# Allegro board LAY-97011_A1.brd
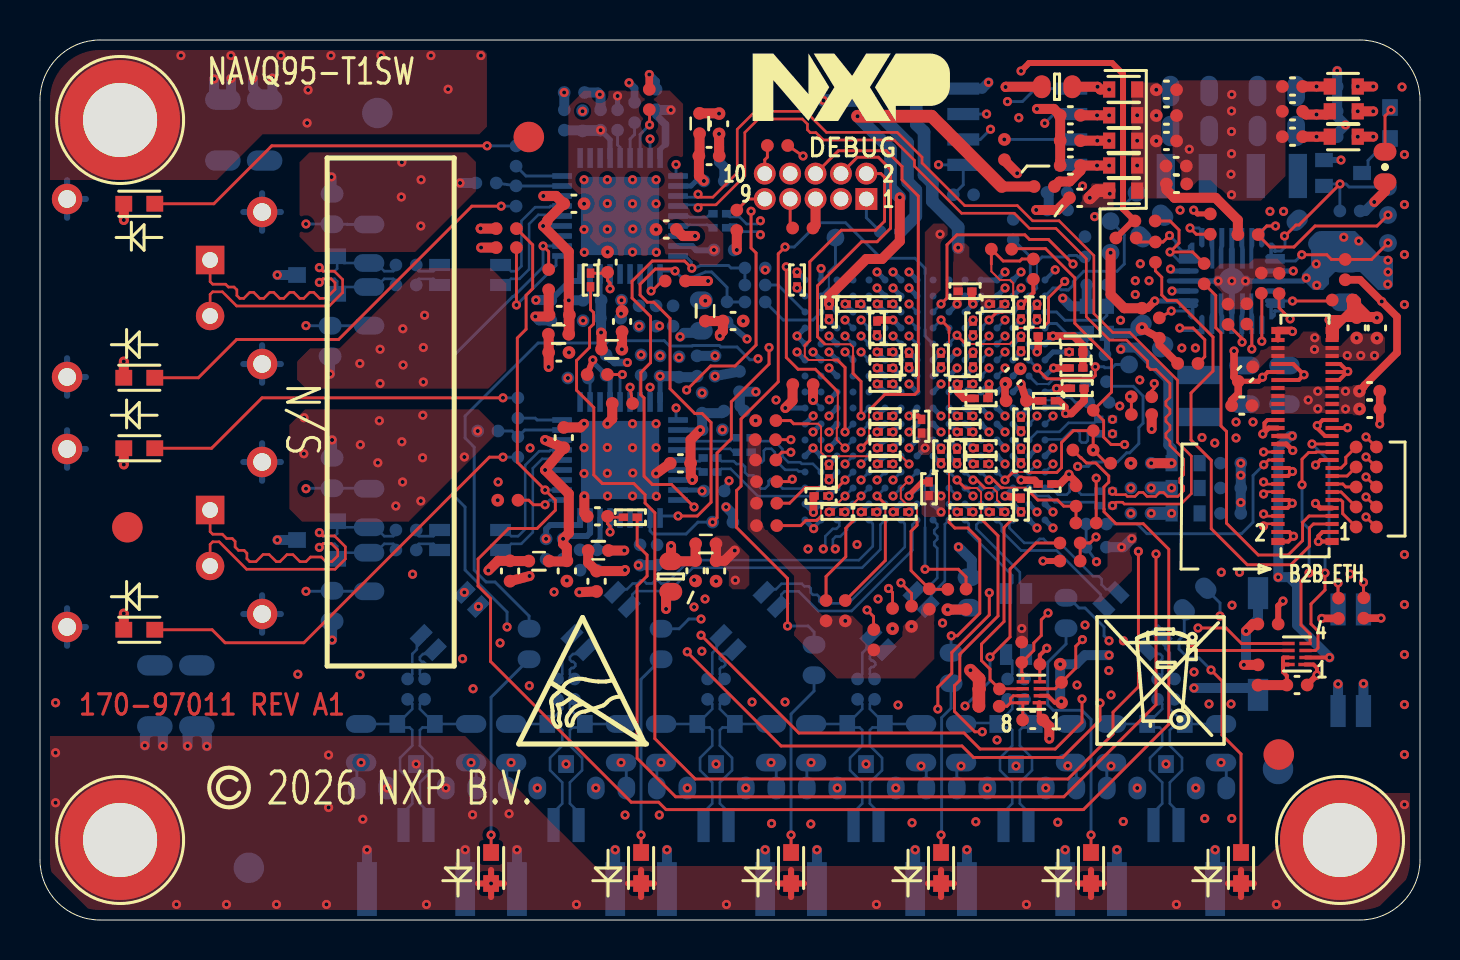
[diagram p0: board, top side]
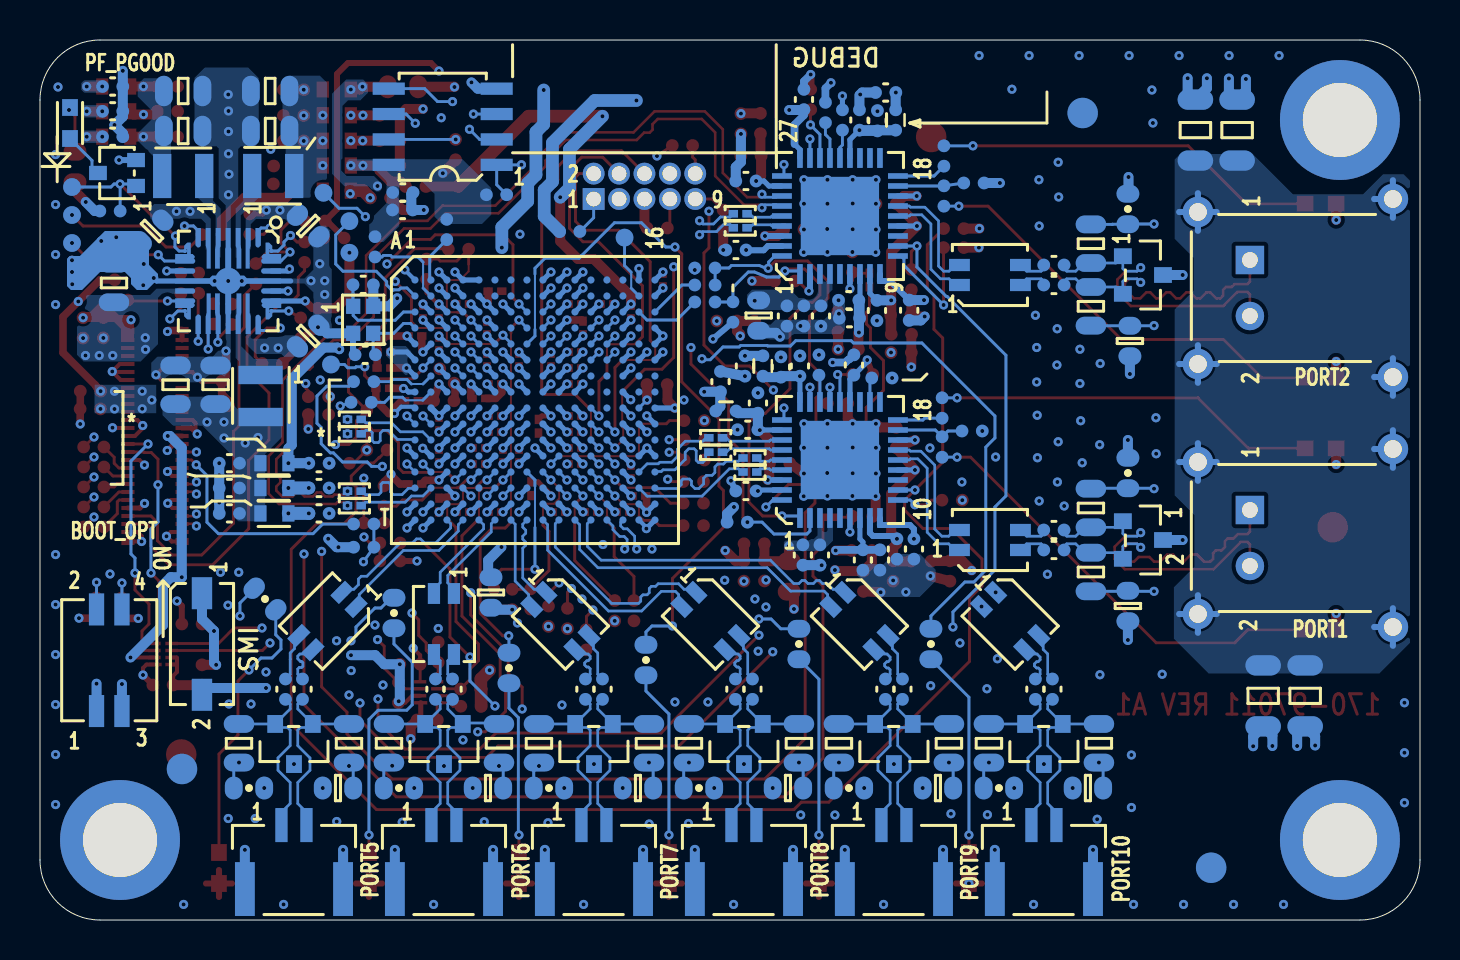
[diagram p1: board, bottom side, seen from below]

Outline 69.01 x 44 mm; copper layers: TOP, L2_GND1, L3_SIG1, L4_SIG2, L5_GND2, BOTTOM. Coordinates in mm from the lower left corner of the outline.
Outline path: 0,41 arc(0.88,43.12) 3,44 66.01,44 arc(68.13,43.12) 69.01,41 69.01,3 arc(68.13,0.88) 66.01,0 3,0 arc(0.88,0.88) 0,3 0,41

## Design rules (mm)
constraint set DEFAULT: min track width 0.145
net group DP1: nets TJA2_TRX_M TJA2_TRX_P
net group DP2: nets TJA2_TRX_CON_M TJA2_TRX_CON_P
net group DP3: nets TJA1_TRX_M TJA1_TRX_P
net group DP4: nets TJA1_TRX_CON_M TJA1_TRX_CON_P
net group DP5: nets SW_100BT1_TRX10_M SW_100BT1_TRX10_P
net group DP6: nets SW_100BT1_TRX9_M SW_100BT1_TRX9_P
net group DP7: nets SW_100BT1_TRX8_M SW_100BT1_TRX8_P
net group DP8: nets SW_100BT1_TRX7_M SW_100BT1_TRX7_P
net group DP9: nets SW_100BT1_TRX6_M SW_100BT1_TRX6_P
net group DP10: nets SW_100BT1_TRX5_M SW_100BT1_TRX5_P
net group DP11: nets N20527855 N20527862
net group DP12: nets N20256327 N20256378
net group ETH1: nets N20229809 N20245926
net group ETH2: nets N20074020 N20074039
net group ETH3: nets N20229760 N20229763
net group ETH4: nets N20064311 N20064322
net group ETH5: nets N20231645 N20231659
net group ETH_RX1: nets ETH_RX1_N ETH_RX1_P
net group ETH_RX2: nets ETH_RX2_N ETH_RX2_P
net group ETH_RX4: nets ETH_RX4_N ETH_RX4_P
net group ETH_TX1: nets ETH_TX1_N ETH_TX1_P
net group ETH_TX2: nets ETH_TX2_N ETH_TX2_P
net group ETH_TX4: nets ETH_TX4_N ETH_TX4_P
net group TRX_CON0: nets TRX_CON0_N TRX_CON0_P
net group TRX_CON0_C: nets TRX_CON0_C_N TRX_CON0_C_P
net group TRX_CON1: nets TRX_CON1_N TRX_CON1_P
net group TRX_CON1_C: nets TRX_CON1_C_N TRX_CON1_C_P
net group TRX_CON2: nets TRX_CON2_N TRX_CON2_P
net group TRX_CON2_C: nets TRX_CON2_C_N TRX_CON2_C_P
net group TRX_CON3: nets TRX_CON3_N TRX_CON3_P
net group TRX_CON3_C: nets TRX_CON3_C_N TRX_CON3_C_P
net group TRX_CON4: nets TRX_CON4_N TRX_CON4_P
net group TRX_CON4_C: nets TRX_CON4_C_N TRX_CON4_C_P
net group TRX_CON5: nets TRX_CON5_N TRX_CON5_P
net group TRX_CON5_C: nets TRX_CON5_C_N TRX_CON5_C_P
net group POWER: nets N20616572 N20619103 SW_VDD11_CORE SW_VDD33_AO SW_VDDA11 SW_VDDA11_SGMII SW_VDDA25 SW_VDDA33_SGMII SW_VDDA33_VREG_IN SW_VDDIO SW_VDDIO_DBG SW_VDDIO_HOST SW_VDDIO_MII2 SW_VDDIO_MII3 SW_VDDIO_SMI_OUT VDD_PF_1V1 VDD_PF_1V8 VDD_PF_3V3 VDD_SYS_1V8 VDD_SYS_3V3 VDD_SYS_5V0 VDDA_TRX_F_1 VDDA_TRX_F_2 VDDIO_PHY_1 VDDIO_PHY_2 VDDOTP
net group QSPI: nets QSPI_IO0 QSPI_IO1 QSPI_IO2 QSPI_IO3 QSPI_SCLK QSPI_SS_N
net group SPI: nets SPI4_PCS1 SPI4_PCS2 SPI4_SCK SPI4_SIN SPI4_SOUT

## Placement (name value [footprint] x y rotation side)
BH1  MH3.7_6  [MH236-146P]  4.01 40 0 top
BH2  MH3.7_6  [MH236-146P]  4.01 4 0 top
BH3  MH3.7_6  [MH236-146P]  65.01 4 0 top
C1  0.1uF  [CC0402_25]  62.63 41.67 180 top
C2  4.7uF  [CC0603_OV]  50.86 41.66 180 top
C3  0.1uF  [CC0402_25]  56.33 41.51 0 top
C4  0.1uF  [CC0402_25]  62.63 40.44 180 top
C5  1uF  [CC0402_25]  51.52 40.23 180 top
C6  0.1uF  [CC0402_25]  56.33 40.22 0 top
C7  0.1uF  [CC0402_25]  33.96 39.81 270 top
C8  0.1uF  [CC0402_25]  62.63 39.16 180 top
C9  1uF  [CC0402_25]  51.52 38.97 180 top
C10  0.1uF  [CC0402_25]  56.33 38.95 0 top
C11  1uF  [CC0402_25]  33.46 38.2 0 top
C12  1uF  [CC0402_25]  51.52 37.73 180 top
C13  0.1uF  [CC0402_25]  56.81 37.7 0 top
C14  0.1uF  [CC0402_25]  56.83 36.8 0 top
C15  1uF  [CC0402_25]  51.99 36.11 180 top
C16  0.1uF  [CC0402_25]  26.7 35.81 0 top
C17  0.1uF  [CC0402_25]  31.31 34.52 180 top
C18  0.01uF  [CC0402_25]  28.38 32.89 90 top
C19  0.1uF  [CC0201]  27.53 32 270 top
C20  0.1uF  [CC0201]  37.86 32 90 top
C21  0.1uF  [CC0201]  46.26 31.44 0 top
C22  0.1uF  [CC0201]  40.66 30.8 180 top
C23  0.1uF  [CC0201]  42.26 30.8 180 top
C24  0.1uF  [CC0201]  47.87 30.8 0 top
C25  0.1uF  [CC0201]  39.46 30.4 270 top
C26  0.1uF  [CC0201]  49.06 30.4 270 top
C27  0.1uF  [CC0201]  49.86 30.4 270 top
C28  1uF  [CC0402_25]  25.96 30.25 180 top
C29  0.1uF  [CC0402_25]  34.66 29.95 0 top
C30  0.1uF  [CC0402_25]  29.11 29.93 90 top
C31  0.1uF  [CC0402_25]  65.84 29.61 90 top
C32  1uF  [CC0402_25]  66.85 29.6 90 top
C33  0.1uF  [CC0201]  41.86 29.6 90 top
C34  0.1uF  [CC0201]  46.66 29.6 90 top
C35  0.1uF  [CC0201]  50.26 29.2 0 top
C36  0.1uF  [CC0201]  49.06 28.8 270 top
C37  0.1uF  [CC0201]  42.26 28.4 0 top
C38  0.1uF  [CC0201]  51.81 28.4 0 top
C39  0.1uF  [CC0402_25]  25.94 28.38 0 top
C40  0.1uF  [CC0201]  43.46 28 270 top
C41  0.1uF  [CC0201]  45.06 28 270 top
C42  0.1uF  [CC0201]  46.66 28 270 top
C43  0.1uF  [CC0201]  42.26 27.6 0 top
C44  0.1uF  [CC0201]  51.81 27.6 0 top
C45  0.1uF  [CC0402_25]  60.28 27.3 225 top
C46  1uF  [CC0402_25]  48.66 27.2 45 top
C47  0.1uF  [CC0201]  42.26 26.8 0 top
C48  0.1uF  [CC0201]  46.26 26.8 180 top
C49  0.1uF  [CC0201]  51.87 26.59 0 top
C50  0.1uF  [CC0402_25]  66.48 26.44 0 top
C51  0.1uF  [CC0201]  47.06 26.08 180 top
C52  0.1uF  [CC0201]  50.43 25.96 0 top
C53  0.1uF  [CC0402_25]  60.09 25.72 180 top
C54  1uF  [CC0402_25]  66.49 25.55 0 top
C55  0.1uF  [CC0201]  42.26 25.2 0 top
C56  0.1uF  [CC0201]  46.26 25.2 180 top
C57  0.1uF  [CC0201]  49.06 24.8 90 top
C58  0.1uF  [CC0201]  44.08 24.69 90 top
C59  0.1uF  [CC0201]  42.26 24.4 0 top
C60  0.1uF  [CC0201]  46.26 24.4 180 top
C61  0.1uF  [CC0402_25]  26.19 24.12 90 top
C62  0.1uF  [CC0201]  42.26 23.6 0 top
C63  0.1uF  [CC0201]  47.06 23.6 0 top
C64  0.1uF  [CC0201]  45.06 23.2 90 top
C65  0.1uF  [CC0201]  45.86 23.2 90 top
C66  0.1uF  [CC0201]  49.06 23.2 270 top
C67  0.1uF  [CC0402_25]  32.02 22.83 180 top
C68  0.1uF  [CC0201]  42.26 22.8 0 top
C69  0.1uF  [CC0201]  47.06 22.8 0 top
C70  0.1uF  [CC0201]  39.46 22.4 90 top
C71  0.1uF  [CC0201]  50.26 21.8 0 top
C72  0.1uF  [CC0201]  44.46 21.56 90 top
C73  0.1uF  [CC0201]  39.06 21.2 180 top
C74  0.1uF  [CC0201]  49.06 20.75 270 top
C75  0.1uF  [CC0201]  39.86 20.4 0 top
C76  0.1uF  [CC0201]  41.46 20.4 0 top
C77  0.1uF  [CC0201]  43.06 20.4 0 top
C78  0.1uF  [CC0201]  46.26 20.4 180 top
C79  0.1uF  [CC0201]  47.86 20.4 180 top
C80  0.01uF  [CC0402_25]  27.87 20.18 180 top
C81  0.1uF  [CC0201]  29.52 20.14 0 top
C82  1uF  [CC0402_25]  32.78 17.46 270 top
C83  1uF  [CC0402_25]  26.35 17.45 270 top
C84  0.1uF  [CC0402_25]  23.51 17.45 270 top
C85  0.1uF  [CC0402_25]  33.81 17.45 270 top
C86  10uF  [CC0603_OV]  31.54 17.18 270 top
C87  0.1uF  [CC0402_25]  27.83 16.94 270 top
C88  0.1uF  [CC0402_25]  62.86 11.75 0 top
C89  0.1uF  [CC0402_25]  49.64 10 0 top
C90  1uF  [CC0402_25]  65.37 41.67 180 bottom
C91  22uF  [CC0805_OV]  61.85 41.45 180 bottom
C92  22uF  [CC0805_OV]  57.5 41.45 0 bottom
C93  0.1uF  [CC0402_25]  26.72 41.38 0 bottom
C94  0.1uF  [CC0402_25]  30.81 41.02 90 bottom
C95  1uF  [CC0402_25]  65.37 40.44 180 bottom
C96  0.1uF  [CC0402_25]  28.03 40 90 bottom
C97  1uF  [CC0402_25]  27.13 39.96 90 bottom
C98  1000pF  [CC1206_OV]  9.14 39.49 90 bottom
C99  22uF  [CC0805_OV]  61.85 39.45 180 bottom
C100  22uF  [CC0805_OV]  57.5 39.45 0 bottom
C101  1uF  [CC0402_25]  65.37 39.16 180 bottom
C102  0.1uF  [CC0402_25]  33.71 36.95 0 bottom
C103  0.1uF  [CC0402_25]  50.86 36.38 180 bottom
C104  1uF  [CC0402_25]  50.87 35.5 180 bottom
C105  0.1uF  [CC0201]  33.99 35.31 0 bottom
C106  4.7uF  [CC0603_OV]  55.6 34.7 225 bottom
C107  0.1uF  [CC0201]  33.99 34.61 0 bottom
C108  4.7uF  [CC0603_OV]  63.41 34.45 315 bottom
C109  0.1uF  [CC0402_25]  34.21 33.5 0 bottom
C110  0.1uF  [CC0402_25]  18.31 32.75 180 bottom
C111  8.0pF  [CC0402_25]  52.85 31.76 180 bottom
C112  0.1uF  [CC0402_25]  18.31 31.75 180 bottom
C113  0.1uF  [CC0402_25]  28.57 30.99 0 bottom
C114  22uF  [CC0805_OV]  65.31 31.85 90 bottom
C115  0.1uF  [CC0402_25]  25.54 30.49 270 bottom
C116  0.1uF  [CC0402_25]  27.16 30.48 270 bottom
C117  0.1uF  [CC0402_25]  30.81 30.2 270 bottom
C118  0.1uF  [CC0402_25]  29.96 30.2 270 bottom
C119  1uF  [CC0402_25]  31.66 30.2 270 bottom
C120  10uF  [CC0603_OV]  33.07 30.23 270 bottom
C121  1uF  [CC0402_25]  28.53 30.09 0 bottom
C122  4.7uF  [CC0603_OV]  55.6 29.2 135 bottom
C123  4700pf  [CC0603_OV]  14.51 28.95 270 bottom
C124  8.0pF  [CC0402_25]  52.74 28.26 0 bottom
C125  0.1uF  [CC0402_25]  28.31 27.75 90 bottom
C126  0.1uF  [CC0402_25]  33.76 27.7 270 bottom
C127  0.1uF  [CC0402_25]  31.01 27.7 90 bottom
C128  1uF  [CC0402_25]  31.96 27.65 90 bottom
C129  0.1uF  [CC0402_25]  34.98 26.92 90 bottom
C130  22uF  [CC0805_OV]  62.23 26.76 90 bottom
C131  22uF  [CC0805_OV]  60.23 26.76 90 bottom
C132  1uF  [CC0402_25]  33.11 25.85 90 bottom
C133  0.1uF  [CC0201]  53.29 25.03 180 bottom
C134  0.1uF  [CC0402_25]  33.62 24.51 0 bottom
C135  0.1uF  [CC0201]  53.29 24.31 180 bottom
C136  0.1uF  [CC0201]  35.22 24.11 0 bottom
C137  0.1uF  [CC0201]  35.22 23.39 0 bottom
C138  0.1uF  [CC0201]  33.51 23.1 0 bottom
C139  0.1uF  [CC0402_25]  59.54 22.84 0 bottom
C140  1uF  [CC0402_25]  55.06 22.84 180 bottom
C141  0.1uF  [CC0201]  33.51 22.4 0 bottom
C142  0.1uF  [CC0402_25]  59.54 21.6 0 bottom
C143  1uF  [CC0402_25]  55.06 21.6 180 bottom
C144  0.1uF  [CC0201]  53.29 21.44 180 bottom
C145  0.1uF  [CC0402_25]  33.71 21.45 0 bottom
C146  0.1uF  [CC0201]  53.29 20.72 180 bottom
C147  0.1uF  [CC0402_25]  59.54 20.33 0 bottom
C148  1uF  [CC0402_25]  55.06 20.33 180 bottom
C149  0.1uF  [CC0402_25]  18.31 19.5 180 bottom
C150  0.1uF  [CC0402_25]  18.31 18.5 180 bottom
C151  0.1uF  [CC0402_25]  30.86 18.25 270 bottom
C152  0.1uF  [CC0402_25]  30.01 18.25 270 bottom
C153  1uF  [CC0402_25]  27.86 18 270 bottom
C154  0.1uF  [CC0402_25]  26.16 18.55 270 bottom
C155  0.1uF  [CC0402_25]  25.31 18.55 270 bottom
C156  0.1uF  [CC0402_25]  27.01 18 270 bottom
C157  10uF  [CC0603_OV]  46.46 16.38 270 bottom
C158  4700pf  [CC0603_OV]  14.61 15.7 270 bottom
C159  0.1uF  [CC0402_25]  56.73 11.54 90 bottom
C160  0.1uF  [CC0402_25]  55.88 11.54 90 bottom
C161  0.1uF  [CC0402_25]  49.23 11.54 90 bottom
C162  0.1uF  [CC0402_25]  48.38 11.54 90 bottom
C163  0.1uF  [CC0402_25]  41.73 11.54 90 bottom
C164  0.1uF  [CC0402_25]  40.88 11.54 90 bottom
C165  0.1uF  [CC0402_25]  34.23 11.54 90 bottom
C166  0.1uF  [CC0402_25]  33.38 11.54 90 bottom
C167  0.1uF  [CC0402_25]  26.73 11.54 90 bottom
C168  0.1uF  [CC0402_25]  25.88 11.54 90 bottom
C169  0.1uF  [CC0402_25]  19.23 11.54 90 bottom
C170  0.1uF  [CC0402_25]  18.38 11.54 90 bottom
C171  1000pF  [CC1206_OV]  7.84 11.21 270 bottom
C172  4700pf  [CC0603_OV]  54.11 6.6 0 bottom
C173  4700pf  [CC0603_OV]  46.61 6.6 0 bottom
C174  4700pf  [CC0603_OV]  39.11 6.6 0 bottom
C175  4700pf  [CC0603_OV]  31.61 6.6 0 bottom
C176  4700pf  [CC0603_OV]  24.11 6.6 0 bottom
C177  4700pf  [CC0603_OV]  16.61 6.6 0 bottom
D1  LED_GRN  [LED_0603]  4.97 35.81 180 top
D2  LED_AMB  [LED_0603]  4.97 27.11 180 top
D3  LED_GRN  [LED_0603]  4.97 23.59 180 top
D4  LED_AMB  [LED_0603]  4.97 14.51 180 top
D5  LED_GRN  [LED_0603]  22.56 2.6 270 top
D6  LED_GRN  [LED_0603]  30.06 2.6 270 top
D7  LED_GRN  [LED_0603]  37.56 2.6 270 top
D8  LED_GRN  [LED_0603]  45.06 2.6 270 top
D9  LED_GRN  [LED_0603]  52.56 2.6 270 top
D10  LED_GRN  [LED_0603]  60.06 2.6 270 top
D11  LED_GRN  [LED_0603]  67.51 39.85 270 bottom
D12  PESD2ETH1G-T  [SOT23_A]  13.86 32.25 270 bottom
D13  PESD2ETH1G-T  [SOT23_A]  13.86 19 270 bottom
D14  PESD2ETH1G-T  [SOT23_A]  56.31 8.8 0 bottom
D15  PESD2ETH1G-T  [SOT23_A]  48.81 8.8 0 bottom
D16  PESD2ETH1G-T  [SOT23_A]  41.31 8.8 0 bottom
D17  PESD2ETH1G-T  [SOT23_A]  33.81 8.8 0 bottom
D18  PESD2ETH1G-T  [SOT23_A]  26.31 8.8 0 bottom
D19  PESD2ETH1G-T  [SOT23_A]  18.81 8.8 0 bottom
J2  SHF-105-01-L-D-RA  [CON2X5_50_TH_RA]  41.32 36.05 180 bottom
J3  CON JACK  [CON2_2P8_JACK_TH]  8.51 33 90 bottom
J4  CON JACK  [CON2_2P8_JACK_TH]  8.51 20.5 90 bottom
J5  SM02B-GHS-TB(LF)(SN)  [CON_1X2_1P25_5P8X4P1_SM_RA]  56.31 2.5 180 bottom
J6  SM02B-GHS-TB(LF)(SN)  [CON_1X2_1P25_5P8X4P1_SM_RA]  48.81 2.5 180 bottom
J7  SM02B-GHS-TB(LF)(SN)  [CON_1X2_1P25_5P8X4P1_SM_RA]  41.31 2.5 180 bottom
J8  SM02B-GHS-TB(LF)(SN)  [CON_1X2_1P25_5P8X4P1_SM_RA]  33.81 2.5 180 bottom
J9  SM02B-GHS-TB(LF)(SN)  [CON_1X2_1P25_5P8X4P1_SM_RA]  26.31 2.5 180 bottom
J10  SM02B-GHS-TB(LF)(SN)  [CON_1X2_1P25_5P8X4P1_SM_RA]  18.81 2.5 180 bottom
L1  330 OHM  [IND_1608]  65.19 41.67 0 top
L2  330 OHM  [IND_1608]  54.16 41.52 180 top
L3  330 OHM  [IND_1608]  65.19 40.44 0 top
L4  330 OHM  [IND_1608]  54.16 40.23 180 top
L5  120 OHM@100MHZ  [IND_0402]  32.98 39.83 270 top
L6  330 OHM  [IND_1608]  65.19 39.16 0 top
L7  330 OHM  [IND_1608]  54.16 38.97 180 top
L8  330 OHM  [IND_1608]  54.16 37.73 180 top
L9  330 OHM  [IND_1608]  54.16 36.47 180 top
L10  120 OHM@100MHZ  [IND_0402]  33.27 30.45 90 top
L11  120 OHM@100MHZ  [IND_0402]  25.93 29.29 180 top
L12  120 OHM@100MHZ  [IND_0402]  28.59 28.54 180 top
L13  120 OHM@100MHZ  [IND_0402]  33.29 18.81 180 top
L14  120 OHM@100MHZ  [IND_0402]  27.92 18.48 0 top
L15  120 OHM@100MHZ  [IND_0402]  24.95 17.95 180 top
L16  120 OHM@100MHZ  [IND_0402]  26.22 40 90 bottom
L17  DLW32MH101XT2  [IND_3P4X2P7_SMT]  21.51 32.25 180 bottom
L18  120 OHM@100MHZ  [IND_0402]  32.86 27.7 90 bottom
L19  120 OHM@100MHZ  [IND_0402]  34.71 25.45 180 bottom
L20  330 OHM  [IND_1608]  57.29 22.84 180 bottom
L21  330 OHM  [IND_1608]  57.29 21.6 180 bottom
L22  330 OHM  [IND_1608]  57.29 20.33 180 bottom
L23  DLW32MH101XT2  [IND_3P4X2P7_SMT]  21.51 19 180 bottom
L24  200uH @ 100KHz  [IND_ACT1210_SM]  54.63 14.95 315 bottom
L25  200uH @ 100KHz  [IND_ACT1210_SM]  42.98 14.95 225 bottom
L26  200uH @ 100KHz  [IND_ACT1210_SM]  35.48 14.95 225 bottom
L27  200uH @ 100KHz  [IND_ACT1210_SM]  28.03 14.95 225 bottom
L28  200uH @ 100KHz  [IND_ACT1210_SM]  20.49 14.95 225 bottom
L29  200uH @ 100KHz  [IND_ACT1210_SM]  48.81 14.8 270 bottom
LBK1  0.47 uH  [IND2520]  61.85 37.2 0 bottom
LBK2  0.47 uH  [IND2520]  57.35 37.2 180 bottom
LBK3  0.47 uH  [IND2520]  57.98 26.2 270 bottom
NOREF  -  []  45.91 0.45 0 top
NOREF#2  -  []  27.31 13.52 90 top
NOREF#3  -  []  52.35 29.34 0 top
NOREF#4  -  []  57.99 32.1 0 top
NOREF#5  -  []  61.9 19.4 90 top
NOREF#6  -  []  23.85 1.55 0 top
NOREF#7  -  []  54.88 12.79 0 top
NOREF#8  -  []  53.35 29.34 90 top
NOREF#9  -  []  49.07 10.71 90 top
NOREF#10  -  []  47.46 13.1 0 top
NOREF#11  -  []  33.32 14.7 0 top
NOREF#12  -  []  27.78 12.79 90 top
NOREF#13  -  []  58.02 32.61 0 top
NOREF#14  -  []  49.14 10.86 0 top
NOREF#15  -  []  61.9 29.48 0 top
NOREF#16  -  []  53.7 28.96 90 top
NOREF#17  -  []  58.75 36.05 0 top
NOREF#18  -  []  63.34 10.14 90 top
NOREF#19  -  []  40.05 36.05 0 top
NOREF#20  -  []  57.95 32.37 0 top
NOREF#21  -  []  62.36 12.62 90 top
NOREF#22  -  []  8.51 20.5 90 top
NOREF#23  -  []  19.98 18.5 90 top
NOREF#24  -  []  35.64 39.95 0 top
NOREF#25  -  []  -3.64 22.6 0 top
NOREF#26  -  []  26.11 21 90 top
NOREF#27  -  []  36.24 36.05 0 top
NOREF#28  -  []  58.02 31.3 0 top
NOREF#29  -  []  36.24 37.32 90 top
NOREF#30  -  []  38.26 20 0 top
NOREF#31  -  []  59.13 24.8 90 top
NOREF#32  -  []  4.01 4 0 top
NOREF#33  -  []  63.25 36.05 90 top
NOREF#34  -  []  62.43 13.82 0 top
NOREF#35  -  []  58 30.88 0 top
NOREF#36  -  []  26.01 32.2 0 top
NOREF#37  -  []  61.55 36.05 90 top
NOREF#38  -  []  -3.64 35.1 0 top
NOREF#39  -  [unnamed#2]  24.44 39.15 0 top
NOREF#40  -  []  38.26 20 0 top
NOREF#41  -  []  58 33.02 0 top
NOREF#42  -  []  42.26 13.52 90 top
NOREF#43  -  []  55.36 13.52 0 top
NOREF#44  -  []  19.98 31.75 90 top
NOREF#45  -  []  56.95 31.07 0 top
NOREF#46  -  []  57.43 30.45 0 top
NOREF#47  -  []  31.35 1.55 0 top
NOREF#48  -  [unnamed#2]  4.37 19.64 0 top
NOREF#49  -  []  32.37 38.54 90 top
NOREF#50  -  []  38.26 20 90 top
NOREF#51  -  []  23.96 8.8 0 top
NOREF#52  -  []  62.43 13.47 90 top
NOREF#53  -  []  49.14 11.91 0 top
NOREF#54  -  []  62.36 13.97 0 top
NOREF#55  -  []  58.1 29.77 90 top
NOREF#56  -  []  8.51 20.5 90 top
NOREF#57  -  []  11.11 27.8 90 top
NOREF#58  -  []  60.91 11.26 90 top
NOREF#59  -  []  46.35 1.55 0 top
NOREF#60  -  []  32.37 38.54 0 top
NOREF#61  -  []  23.41 0.45 90 top
NOREF#62  -  []  61.1 29.79 90 top
NOREF#63  -  []  59.6 31.95 0 top
NOREF#64  -  []  23.41 0.45 0 top
NOREF#65  -  []  24.96 34.1 0 top
NOREF#66  -  []  16.35 1.55 0 top
NOREF#67  -  []  57.39 0 90 top
NOREF#68  -  []  42.73 12.79 90 top
NOREF#69  -  []  59.6 31.95 0 top
NOREF#70  -  []  64.91 10.45 0 top
NOREF#71  -  []  59.51 10.95 90 top
NOREF#72  -  []  26.11 25 0 top
NOREF#73  -  []  37.26 19 0 top
NOREF#74  -  []  19.06 14.22 0 top
NOREF#75  -  []  22.71 30.7 0 top
NOREF#76  -  []  57.99 31.8 0 top
NOREF#77  -  []  6.87 4.9 0 top
NOREF#78  -  []  8.51 33 90 top
NOREF#79  -  []  8.51 33 90 top
NOREF#80  -  []  67.87 4.9 0 top
NOREF#81  -  []  64.28 18.34 90 top
NOREF#82  -  []  38.85 1.55 0 top
NOREF#83  -  []  57.95 31.53 0 top
NOREF#84  -  []  56.79 14.7 90 top
NOREF#85  -  []  32.01 20 90 top
NOREF#86  -  []  34.76 13.52 90 top
NOREF#87  -  []  20.25 12.79 90 top
NOREF#88  -  []  -12.84 -36.04 0 top
NOREF#89  -  []  62.43 12.78 0 top
NOREF#90  -  []  34.05 14.22 0 top
NOREF#91  -  []  60.8 37.2 0 top
NOREF#92  -  []  1.36 14.65 90 top
NOREF#93  -  []  -3.64 28.1 90 top
NOREF#94  -  []  57.98 25.15 90 top
NOREF#95  -  []  60.45 38.35 0 top
NOREF#96  -  []  61.85 29.7 90 top
NOREF#97  -  []  48.31 13.27 0 top
NOREF#98  -  []  52.86 8.8 0 top
NOREF#99  -  []  32.01 32.2 90 top
NOREF#100  -  []  53.41 0.45 0 top
NOREF#101  -  [unnamed#2]  61.94 8.28 0 top
NOREF#102  -  []  40.82 14.7 0 top
NOREF#103  -  []  27.01 20.1 90 top
NOREF#104  -  []  15.91 0.45 90 top
NOREF#105  -  []  61.76 30.45 90 top
NOREF#106  -  []  19.81 17.65 0 top
NOREF#107  -  []  56.3 37.2 0 top
NOREF#108  -  []  56.06 14.22 90 top
NOREF#109  -  []  11.11 15.3 90 top
NOREF#110  -  []  9.45 6.6 0 top
NOREF#111  -  []  49.07 12.06 0 top
NOREF#112  -  []  38.26 20 90 top
NOREF#113  -  []  25.87 14.7 0 top
NOREF#114  -  []  37.26 19 90 top
NOREF#115  -  []  19.98 18.5 0 top
NOREF#116  -  []  50.16 13.1 90 top
NOREF#117  -  []  26.01 20 0 top
NOREF#118  -  []  58.1 29.77 90 top
NOREF#119  -  []  49.14 11.56 90 top
NOREF#120  -  []  38.41 0.45 90 top
NOREF#121  -  []  59.51 10.95 0 top
NOREF#122  -  []  57.35 29.7 0 top
NOREF#123  -  []  30.91 0.45 90 top
NOREF#124  -  []  0 24.53 0 top
NOREF#125  -  []  27.01 32.3 90 top
NOREF#126  -  []  53.41 0.45 90 top
NOREF#127  -  []  41.55 14.22 0 top
NOREF#128  -  []  26.11 37.2 0 top
NOREF#129  -  []  -3.64 15.6 90 top
NOREF#130  -  []  6.87 40.9 0 top
NOREF#131  -  []  30.91 0.45 0 top
NOREF#132  -  []  19.77 13.52 90 top
NOREF#133  -  []  20.71 12.7 90 top
NOREF#134  -  []  -467.22 -286.29 0 top
NOREF#135  -  []  53.85 1.55 0 top
NOREF#136  -  []  35.23 12.79 90 top
NOREF#137  -  []  1.36 27.15 90 top
NOREF#138  -  []  45.91 0.45 90 top
NOREF#139  -  []  8.51 30.2 90 top
NOREF#140  -  []  19.81 17.65 90 top
NOREF#141  -  []  18.34 14.7 0 top
NOREF#142  -  []  56.95 32.83 0 top
NOREF#143  -  []  8.51 17.7 90 top
NOREF#144  -  []  49.31 13.27 90 top
NOREF#145  -  []  62.23 30.06 0 top
NOREF#146  -  []  26.11 33.2 90 top
NOREF#147  -  []  26.6 14.22 0 top
NOREF#148  -  []  38.41 0.45 0 top
NOREF#149  -  []  56.83 24.8 0 top
NOREF#150  -  []  63.34 15.84 0 top
NOREF#151  -  []  15.91 0.45 0 top
NOREF#152  -  []  52 28.96 0 top
NOREF#153  -  []  19.98 31.75 0 top
NOREF#154  -  [unnamed#2]  10.44 2.61 180 bottom
NOREF#155  -  [unnamed#2]  16.87 40.35 180 bottom
NOREF#156  -  [unnamed#2]  61.91 7.55 180 bottom
P17  CON PLUG 2X25  [CON50_0P4_11P72X2P05_SM_A]  63.26 24.2 90 top
Q1  NX3020NAKW,115  [SC70_3]  65.16 37.35 90 bottom
R1  10K  [RC0402_25]  30.47 41.02 90 top
R2  0 OHM  [RC0402_25]  36.88 38.73 180 top
R3  10K  [RC0402_25]  48.23 38.52 90 top
R4  390  [RC0603_OV]  67.26 37.65 90 top
R5  0 OHM  [RC0402_25]  50.22 36.67 180 top
R6  0 OHM  [RC0402_25]  34.84 34.99 270 top
R7  2.2K  [RC0402_25]  55.26 34.95 0 top
R8  10K  [RC0402_25]  58.52 34.8 270 top
R9  0 OHM  [RC0402_25]  38.14 34.6 0 top
R10  100k  [RC0402_25]  23.32 34.57 180 top
R11  10K  [RC0402_25]  60.41 34.27 0 top
R12  2.2K  [RC0402_25]  54.31 34.1 0 top
R13  10K  [RC0402_25]  23.32 33.62 0 top
R14  0 OHM  [RC0402_25]  48.08 33.54 0 top
R15  0 OHM  [RC0402_25]  55.78 33.39 270 top
R16  10K  [RC0402_25]  49.67 32.54 90 top
R17  100k  [RC0402_25]  65.27 32.52 90 top
R18  0 OHM  [RC0402_25]  58.21 32.31 270 top
R19  100k  [RC0402_25]  25.44 32.02 270 top
R20  10K  [RC0402_25]  31.77 31.95 180 top
R21  0 OHM  [RC0402_25]  61.07 31.84 270 top
R22  0 OHM  [RC0402_25]  61.96 31.83 270 top
R23  0 OHM  [RC0402_25]  65.12 31 180 top
R24  0 OHM  [RC0402_25]  60.35 30.3 90 top
R25  0 OHM  [RC0402_25]  59.41 30.29 270 top
R26  100k  [RC0402_25]  55.1 30.08 270 top
R27  100k  [RC0402_25]  55.97 29.6 270 top
R28  0 OHM  [RC0402_25]  57.4 27.83 0 top
R29  10K  [RC0402_25]  27.87 27.27 0 top
R30  6.49K  [RC0402_25]  38.15 26.77 180 top
R31  0 OHM  [RC0402_25]  55.08 26.16 180 top
R32  0 OHM  [RC0402_25]  48.82 25.96 180 top
R33  10K  [RC0402_25]  29.12 25.83 180 top
R34  10K  [RC0402_25]  55.08 25.27 180 top
R35  0 OHM  [RC0402_25]  52.67 24.98 270 top
R36  10K  [RC0402_25]  36.29 24.97 180 top
R37  10K  [RC0402_25]  36.28 24.02 0 top
R38  0 OHM  [RC0402_25]  66.32 23.65 0 top
R39  0 OHM  [RC0402_25]  52.16 23.5 0 top
R40  10K  [RC0402_25]  36.29 23 0 top
R41  100k  [RC0402_25]  54.04 22.84 0 top
R42  0 OHM  [RC0402_25]  66.32 22.65 0 top
R43  10K  [RC0402_25]  36.34 21.92 0 top
R44  0 OHM  [RC0402_25]  66.32 21.65 0 top
R45  10K  [RC0402_25]  51.81 21.2 90 top
R46  10K  [RC0402_25]  23.4 20.99 0 top
R47  10K  [RC0402_25]  36.34 20.84 0 top
R48  0 OHM  [RC0402_25]  66.32 20.65 0 top
R49  0 OHM  [RC0402_25]  52.31 19.85 0 top
R50  10K  [RC0402_25]  36.34 19.72 0 top
R51  0 OHM  [RC0402_25]  66.32 19.65 0 top
R52  0 OHM  [RC0402_25]  51.51 18.85 0 top
R53  100k  [RC0402_25]  51.51 17.95 0 top
R54  10K  [RC0402_25]  44.47 16.05 90 top
R55  10K  [RC0402_25]  46.31 16.04 270 top
R56  10K  [RC0402_25]  45.39 16.02 270 top
R57  10K  [RC0402_25]  66.19 15.6 270 top
R58  10K  [RC0402_25]  64.93 15.59 270 top
R59  10K  [RC0402_25]  39.31 15.46 90 top
R60  10K  [RC0402_25]  40.27 15.46 90 top
R61  10K  [RC0402_25]  43.58 15.19 90 top
R62  10K  [RC0402_25]  42.63 15.07 270 top
R63  10K  [RC0402_25]  61.41 14.8 0 top
R64  10K  [RC0402_25]  41.69 14.01 90 top
R65  1.5K  [RC0402_25]  49.09 13.39 270 top
R66  1.5K  [RC0402_25]  50.51 12.79 180 top
R67  200K  [RC0402_25]  60.91 12.25 270 top
R68  1.5K  [RC0402_25]  47.47 11.55 0 top
R69  1.5K  [RC0402_25]  51.08 11.38 90 top
R70  200K  [RC0402_25]  47.46 10.69 0 top
R71  10K  [RC0402_25]  29.73 40.38 90 bottom
R72  10K  [RC0402_25]  28.88 40 90 bottom
R73  1.0M  [RC1206_OV]  11.23 39.49 90 bottom
R74  680  [RC0402_25]  23.81 38.2 90 bottom
R75  10K  [RC0402_25]  22.31 36.85 180 bottom
R76  10K  [RC0402_25]  46.18 36.26 180 bottom
R77  680  [RC0402_25]  23.81 36.2 270 bottom
R78  100K  [RC0603_OV]  14.61 35.55 90 bottom
R79  10K  [RC0402_25]  65.51 35.45 180 bottom
R80  10K  [RC0402_25]  48.67 34.52 270 bottom
R81  100  [RC0402_25]  42.52 34.42 180 bottom
R82  1.0K  [RC0805_OV]  16.46 33.82 90 bottom
R83  10K  [RC0402_25]  52.25 33.66 270 bottom
R84  1.5K  [RC0402_25]  35.76 32.6 180 bottom
R85  0 OHM  [RC0402_25]  35.76 31.75 0 bottom
R86  0 OHM  [RC0402_25]  35.76 30.9 0 bottom
R87  1.0K  [RC0805_OV]  16.46 30.68 270 bottom
R88  1.5K  [RC0402_25]  34.36 30.4 90 bottom
R89  10K  [RC0402_25]  30.06 27.75 90 bottom
R90  10K  [RC0402_25]  26.91 27.1 180 bottom
R91  0 OHM  [RC0402_25]  52.82 26.92 180 bottom
R92  0 OHM  [RC0402_25]  52.94 25.88 180 bottom
R93  680  [RC0402_25]  23.9 25.6 90 bottom
R94  10K  [RC0402_25]  22.4 24.45 180 bottom
R95  680  [RC0402_25]  23.9 23.65 270 bottom
R96  100K  [RC0603_OV]  14.61 22.35 90 bottom
R97  1.0K  [RC0805_OV]  16.46 20.6 90 bottom
R98  10K  [RC0402_25]  34.14 19.89 180 bottom
R99  0 OHM  [RC0402_25]  52.82 19.8 180 bottom
R100  10K  [RC0402_25]  52.82 18.64 180 bottom
R101  1.0K  [RC0805_OV]  16.46 17.4 270 bottom
R102  390  [RC0603_OV]  51.31 15.35 270 bottom
R103  390  [RC0603_OV]  57.76 16.05 225 bottom
R104  390  [RC0603_OV]  45.56 12.6 270 bottom
R105  390  [RC0603_OV]  38.71 13 270 bottom
R106  390  [RC0603_OV]  31.06 13.8 270 bottom
R107  390  [RC0603_OV]  24.46 13.8 270 bottom
R108  1.0M  [RC1206_OV]  5.74 11.21 270 bottom
R109  1.0K  [RC0805_OV]  59.06 8.84 270 bottom
R110  1.0K  [RC0805_OV]  53.56 8.84 270 bottom
R111  1.0K  [RC0805_OV]  51.56 8.84 270 bottom
R112  1.0K  [RC0805_OV]  46.06 8.84 270 bottom
R113  1.0K  [RC0805_OV]  44.06 8.84 270 bottom
R114  1.0K  [RC0805_OV]  38.56 8.84 270 bottom
R115  1.0K  [RC0805_OV]  36.56 8.84 270 bottom
R116  1.0K  [RC0805_OV]  31.06 8.84 270 bottom
R117  1.0K  [RC0805_OV]  29.06 8.84 270 bottom
R118  1.0K  [RC0805_OV]  23.56 8.84 270 bottom
R119  1.0K  [RC0805_OV]  21.56 8.84 270 bottom
R120  1.0K  [RC0805_OV]  16.06 8.84 270 bottom
R121  100K  [RC0603_OV]  58.56 6.6 180 bottom
R122  100K  [RC0603_OV]  51.06 6.6 180 bottom
R123  100K  [RC0603_OV]  43.56 6.6 180 bottom
R124  100K  [RC0603_OV]  36.06 6.6 180 bottom
R125  100K  [RC0603_OV]  28.56 6.6 180 bottom
R126  100K  [RC0603_OV]  21.06 6.6 180 bottom
S1  CHS-01TA1  [SW_2P8X5P7_SM]  60.91 13.8 180 bottom
S2  CHS-02TA  [SW4_DIP_1P27_4P4X5P7]  65.54 12.99 90 bottom
TP1  TP_35MIL  [TESTPOINT_35MIL]  67.41 36.65 270 bottom
TP2  TP_35MIL  [TESTPOINT_35MIL]  54.83 36.36 180 bottom
TP3  TP_35MIL  [TESTPOINT_35MIL]  67.41 35.25 270 bottom
TP4  TP_35MIL  [TESTPOINT_35MIL]  53.54 34.94 180 bottom
TP5  TP_35MIL  [TESTPOINT_35MIL]  39.78 34.12 180 bottom
TP6  TP_35MIL  [TESTPOINT_35MIL]  67.41 33.85 270 bottom
TP7  TP_35MIL  [TESTPOINT_35MIL]  53.53 33.36 270 bottom
TP8  TP_35MIL  [TESTPOINT_35MIL]  54.46 27.77 180 bottom
U1  PCA9306JK  [X2SON8_0P35_1X1P35MM]  62.86 13.3 180 top
U2  PCA9306JK  [X2SON8_0P35_1X1P35MM]  49.57 11.39 180 top
U3  IS25LP080D-JNLE  [SO8_1P27_4X5]  48.87 39.66 0 bottom
U4  TJA1120BHN  [QFN36_0P5_6X6_SOT1092-2]  29.01 35.2 90 bottom
U5  PPF5103AMMAFES  [SOT2089-1_FCQFN28_0P5_4P5SQ]  59.6 31.95 270 bottom
U6  SJA1110AEL  [BGA256_0P8_14X14MM_059H]  44.26 26 180 bottom
U7  TJA1120BHN  [QFN36_0P5_6X6_SOT1092-2]  29.01 23 90 bottom
X1  25MHz  [XTL4_2P1X1P7MM_SM]  52.85 30.01 270 bottom

## Library data of the parts
BH1-BH3 = MOUNT_HOLE
C1-C18 C28-C32 C39 C45 C46 C50 C53 C54 C61 C67 C80 C82-C104 C106 C108-C132 C134 C139 C140 C142 C143 C145 C147-C177 = CAP_NP
C19-C27 C33-C38 C40-C44 C47-C49 C51 C52 C55-C60 C62-C66 C68-C79 C81 C105 C107 C133 C135-C138 C141 C144 C146 = CAP_NP: Tolerance: TOLERANCE; User Part Number: 150-80124
D1-D11 = LED
D12-D19 = ESD_DIODE_2LINE
J2 = CONN_HDR_5X2
J3 J4 = CONN_JACK_2P_4SH
J5-J10 = CONN_2X1_SH
L1-L4 L6-L9 L20-L22 = BEAD
L5 L10-L16 L18 L19 = INDUCTOR_FERRITE
L17 L23 = DLW43
L24-L29 = FILTER_4P
LBK1-LBK3 = INDUCTOR
P17 = HDR_2X25_4S
Q1 = NMOS_NX3008NBK
R1-R81 R83-R86 R88-R96 R98-R100 R102-R126 = RES
R82 R87 R97 R101 = RES: tolerance: 1%
S1 = SW-SPST
S2 = CHS-02TA_SW
TP1-TP8 = T POINT R: Tolerance: TOLERANCE; User Part Number: 510-75618
U1 U2 = PCA9306_TSSOP8
U3 = 25WP_8P
U4 U7 = TJA1120BHN_HVQFN36P
U5 = PF5103_QFN28
U6 = SJA1110_BGA256_B
X1 = XTAL_13

## Footprints (pads in the part's own frame, mm; a bottom-side part is the same pattern mirrored in y, then rotated)
BGA256_0P8_14X14MM_059H
  round 0.356 smd: A1(-6,6) A2(-5.2,6) A3(-4.4,6) A4(-3.6,6) A5(-2.8,6) A6(-2,6) A7(-1.2,6) A8(-0.4,6) A9(0.4,6) A10(1.2,6) A11(2,6) A12(2.8,6) A13(3.6,6) A14(4.4,6) A15(5.2,6) A16(6,6) B1(-6,5.2) B2(-5.2,5.2) B3(-4.4,5.2) B4(-3.6,5.2) B5(-2.8,5.2) B6(-2,5.2) B7(-1.2,5.2) B8(-0.4,5.2) B9(0.4,5.2) B10(1.2,5.2) B11(2,5.2) B12(2.8,5.2) B13(3.6,5.2) B14(4.4,5.2) B15(5.2,5.2) B16(6,5.2) C1(-6,4.4) C2(-5.2,4.4) C3(-4.4,4.4) C4(-3.6,4.4) C5(-2.8,4.4) C6(-2,4.4) C7(-1.2,4.4) C8(-0.4,4.4) C9(0.4,4.4) C10(1.2,4.4) C11(2,4.4) C12(2.8,4.4) C13(3.6,4.4) C14(4.4,4.4) C15(5.2,4.4) C16(6,4.4) D1(-6,3.6) D2(-5.2,3.6) D3(-4.4,3.6) D4(-3.6,3.6) D5(-2.8,3.6) D6(-2,3.6) D7(-1.2,3.6) D8(-0.4,3.6) D9(0.4,3.6) D10(1.2,3.6) D11(2,3.6) D12(2.8,3.6) D13(3.6,3.6) D14(4.4,3.6) D15(5.2,3.6) D16(6,3.6) E1(-6,2.8) E2(-5.2,2.8) E3(-4.4,2.8) E4(-3.6,2.8) E5(-2.8,2.8) E6(-2,2.8) E7(-1.2,2.8) E8(-0.4,2.8) E9(0.4,2.8) E10(1.2,2.8) E11(2,2.8) E12(2.8,2.8) E13(3.6,2.8) E14(4.4,2.8) E15(5.2,2.8) E16(6,2.8) F1(-6,2) F2(-5.2,2) F3(-4.4,2) F4(-3.6,2) F5(-2.8,2) F6(-2,2) F7(-1.2,2) F8(-0.4,2) F9(0.4,2) F10(1.2,2) F11(2,2) F12(2.8,2) F13(3.6,2) F14(4.4,2) F15(5.2,2) F16(6,2) G1(-6,1.2) G2(-5.2,1.2) G3(-4.4,1.2) G4(-3.6,1.2) G5(-2.8,1.2) G6(-2,1.2) G7(-1.2,1.2) G8(-0.4,1.2) G9(0.4,1.2) G10(1.2,1.2) G11(2,1.2) G12(2.8,1.2) G13(3.6,1.2) G14(4.4,1.2) G15(5.2,1.2) G16(6,1.2) H1(-6,0.4) H2(-5.2,0.4) H3(-4.4,0.4) H4(-3.6,0.4) H5(-2.8,0.4) H6(-2,0.4) H7(-1.2,0.4) H8(-0.4,0.4) H9(0.4,0.4) H10(1.2,0.4) H11(2,0.4) H12(2.8,0.4) H13(3.6,0.4) H14(4.4,0.4) H15(5.2,0.4) H16(6,0.4) J1(-6,-0.4) J2(-5.2,-0.4) J3(-4.4,-0.4) J4(-3.6,-0.4) J5(-2.8,-0.4) J6(-2,-0.4) J7(-1.2,-0.4) J8(-0.4,-0.4) J9(0.4,-0.4) J10(1.2,-0.4) J11(2,-0.4) J12(2.8,-0.4) J13(3.6,-0.4) J14(4.4,-0.4) J15(5.2,-0.4) J16(6,-0.4) K1(-6,-1.2) K2(-5.2,-1.2) K3(-4.4,-1.2) K4(-3.6,-1.2) K5(-2.8,-1.2) K6(-2,-1.2) K7(-1.2,-1.2) K8(-0.4,-1.2) K9(0.4,-1.2) K10(1.2,-1.2) K11(2,-1.2) K12(2.8,-1.2) K13(3.6,-1.2) K14(4.4,-1.2) K15(5.2,-1.2) K16(6,-1.2) L1(-6,-2) L2(-5.2,-2) L3(-4.4,-2) L4(-3.6,-2) L5(-2.8,-2) L6(-2,-2) L7(-1.2,-2) L8(-0.4,-2) L9(0.4,-2) L10(1.2,-2) L11(2,-2) L12(2.8,-2) L13(3.6,-2) L14(4.4,-2) L15(5.2,-2) L16(6,-2) M1(-6,-2.8) M2(-5.2,-2.8) M3(-4.4,-2.8) M4(-3.6,-2.8) M5(-2.8,-2.8) M6(-2,-2.8) M7(-1.2,-2.8) M8(-0.4,-2.8) M9(0.4,-2.8) M10(1.2,-2.8) M11(2,-2.8) M12(2.8,-2.8) M13(3.6,-2.8) M14(4.4,-2.8) M15(5.2,-2.8) M16(6,-2.8) N1(-6,-3.6) N2(-5.2,-3.6) N3(-4.4,-3.6) N4(-3.6,-3.6) N5(-2.8,-3.6) N6(-2,-3.6) N7(-1.2,-3.6) N8(-0.4,-3.6) N9(0.4,-3.6) N10(1.2,-3.6) N11(2,-3.6) N12(2.8,-3.6) N13(3.6,-3.6) N14(4.4,-3.6) N15(5.2,-3.6) N16(6,-3.6) P1(-6,-4.4) P2(-5.2,-4.4) P3(-4.4,-4.4) P4(-3.6,-4.4) P5(-2.8,-4.4) P6(-2,-4.4) P7(-1.2,-4.4) P8(-0.4,-4.4) P9(0.4,-4.4) P10(1.2,-4.4) P11(2,-4.4) P12(2.8,-4.4) P13(3.6,-4.4) P14(4.4,-4.4) P15(5.2,-4.4) P16(6,-4.4) R1(-6,-5.2) R2(-5.2,-5.2) R3(-4.4,-5.2) R4(-3.6,-5.2) R5(-2.8,-5.2) R6(-2,-5.2) R7(-1.2,-5.2) R8(-0.4,-5.2) R9(0.4,-5.2) R10(1.2,-5.2) R11(2,-5.2) R12(2.8,-5.2) R13(3.6,-5.2) R14(4.4,-5.2) R15(5.2,-5.2) R16(6,-5.2) T1(-6,-6) T2(-5.2,-6) T3(-4.4,-6) T4(-3.6,-6) T5(-2.8,-6) T6(-2,-6) T7(-1.2,-6) T8(-0.4,-6) T9(0.4,-6) T10(1.2,-6) T11(2,-6) T12(2.8,-6) T13(3.6,-6) T14(4.4,-6) T15(5.2,-6) T16(6,-6)
CC0201
  rect 0.47x0.381 smd: 1(-0.343,0) 2(0.343,0)
CC0402_25
  round 0.635 smd: 1(-0.508,0) 2(0.508,0)
CC0603_OV
  oval 0.889x1.143 smd: 1(-0.762,0) 2(0.762,0)
CC0805_OV
  oval 0.889x1.524 smd: 1(-0.965,0) 2(0.965,0)
CC1206_OV
  oval 1.016x1.778 smd: 1(-1.524,0) 2(1.524,0)
CON2_2P8_JACK_TH
  rect 1.422x1.422 hole 0.787: 1(0,0)
  round 1.422 hole 0.787: 2(-2.8,0)
  round 1.524 hole 0.889: SH1(2.4,2.6) SH2(-5.2,2.6) SH3(3.05,-7.15) SH4(-5.85,-7.15)
CON2X5_50_TH_RA
  rect 1.092x1.092 hole 0.737: 1(0,0)
  round 1.092 hole 0.737: 2(0,1.27) 3(1.27,0) 4(1.27,1.27) 5(2.54,0) 6(2.54,1.27) 7(3.81,0) 8(3.81,1.27) 9(5.08,0) 10(5.08,1.27)
CON50_0P4_11P72X2P05_SM_A
  rect 0.203x0.66 smd: 1(-4.8,-1.355) 2(-4.8,1.355) 3(-4.4,-1.355) 4(-4.4,1.355) 5(-4,-1.355) 6(-4,1.355) 7(-3.6,-1.355) 8(-3.6,1.355) 9(-3.2,-1.355) 10(-3.2,1.355) 11(-2.8,-1.355) 12(-2.8,1.355) 13(-2.4,-1.355) 14(-2.4,1.355) 15(-2,-1.355) 16(-2,1.355) 17(-1.6,-1.355) 18(-1.6,1.355) 19(-1.2,-1.355) 20(-1.2,1.355) 21(-0.8,-1.355) 22(-0.8,1.355) 23(-0.4,-1.355) 24(-0.4,1.355) 25(0,-1.355) 26(0,1.355) 27(0.4,-1.355) 28(0.4,1.355) 29(0.8,-1.355) 30(0.8,1.355) 31(1.2,-1.355) 32(1.2,1.355) 33(1.6,-1.355) 34(1.6,1.355) 35(2,-1.355) 36(2,1.355) 37(2.4,-1.355) 38(2.4,1.355) 39(2.8,-1.355) 40(2.8,1.355) 41(3.2,-1.355) 42(3.2,1.355) 43(3.6,-1.355) 44(3.6,1.355) 45(4,-1.355) 46(4,1.355) 47(4.4,-1.355) 48(4.4,1.355) 49(4.8,-1.355) 50(4.8,1.355)
  rect 0.356x0.66 smd: SH1(-5.275,1.355) SH2(-5.275,-1.355) SH3(5.275,-1.355) SH4(5.275,1.355)
CON_1X2_1P25_5P8X4P1_SM_RA
  rect 0.61x1.702 smd: 1(-0.625,2.247) 2(0.625,2.247)
  rect 0.991x2.692 smd: S1(-2.455,-0.953) S2(2.455,-0.953)
IND2520
  rect 0.914x2.21 smd: 1(-1.05,0) 2(1.05,0)
IND_3P4X2P7_SMT
  rect 1.041x0.61 smd: 1(-1.525,-0.5) 2(1.525,-0.5) 3(1.525,0.5) 4(-1.525,0.5)
IND_0402
  round 0.635 smd: 1(-0.508,0) 2(0.508,0)
IND_1608
  rect 0.61x0.813 smd: 1(-0.7,0) 2(0.7,0)
IND_ACT1210_SM
  rect 1.041x0.61 smd: 1(-1.525,0.5) 2(-1.525,-0.5) 3(1.525,-0.5) 4(1.525,0.5)
LED_0603
  rect 0.838x0.787 smd: A(-0.775,0) C(0.775,0)
MH236-146P
  round 5.994 hole 3.708: 1(0,0)
QFN36_0P5_6X6_SOT1092-2
  rect 0.991x0.279 smd: 1(-2.9,2) 2(-2.9,1.5) 3(-2.9,1) 4(-2.9,0.5) 5(-2.9,0) 6(-2.9,-0.5) 7(-2.9,-1) 8(-2.9,-1.5) 9(-2.9,-2) 19(2.9,-2) 20(2.9,-1.5) 21(2.9,-1) 22(2.9,-0.5) 23(2.9,0) 24(2.9,0.5) 25(2.9,1) 26(2.9,1.5) 27(2.9,2)
  rect 0.279x0.991 smd: 10(-2,-2.9) 11(-1.5,-2.9) 12(-1,-2.9) 13(-0.5,-2.9) 14(0,-2.9) 15(0.5,-2.9) 16(1,-2.9) 17(1.5,-2.9) 18(2,-2.9) 28(2,2.9) 29(1.5,2.9) 30(1,2.9) 31(0.5,2.9) 32(0,2.9) 33(-0.5,2.9) 34(-1,2.9) 35(-1.5,2.9) 36(-2,2.9)
  rect 3.912x3.912 smd: 37(0,0)
RC0402_25
  round 0.635 smd: 1(-0.508,0) 2(0.508,0)
RC0603_OV
  oval 0.889x1.143 smd: 1(-0.762,0) 2(0.762,0)
RC0805_OV
  oval 0.889x1.524 smd: 1(-0.965,0) 2(0.965,0)
RC1206_OV
  oval 1.016x1.778 smd: 1(-1.524,0) 2(1.524,0)
SC70_3
  rect 0.711x0.889 smd: 1(-0.648,-0.952) 2(0.648,-0.952) 3(0,0.952)
SO8_1P27_4X5
  rect 1.6x0.61 smd: 1(-2.7,1.905) 2(-2.7,0.635) 3(-2.7,-0.635) 4(-2.7,-1.905) 5(2.7,-1.905) 6(2.7,-0.635) 7(2.7,0.635) 8(2.7,1.905)
SOT23_A
  rect 0.787x0.889 smd: 1(-0.94,-1.003) 2(0.94,-1.003) 3(0,1.003)
SOT2089-1_FCQFN28_0P5_4P5SQ
  custom 0.975x0.27 smd: 1(-2.163,1.5) 7(-2.163,-1.5) 15(2.163,-1.5) 21(2.175,1.5)
  custom 2.029x0.25 smd: 2(-1.635,1) 6(-1.635,-1) 16(1.635,-1) 20(1.635,1)
  custom 2.029x0.28 smd: 3(-1.635,0.515) 5(-1.635,-0.515) 17(1.635,-0.515) 19(1.635,0.515)
  custom 5.3x5.3 smd: 4(0,0)
  custom 0.838x0.975 smd: 8(-1.5,-2.163) 14(1.5,-2.163) 22(1.5,2.163) 28(-1.5,2.163)
  custom 0.27x1 smd: 9(-1,-2.15) 10(-0.5,-2.15) 12(0.5,-2.15) 13(1,-2.15) 23(1,2.15) 24(0.5,2.15) 26(-0.5,2.15) 27(-1,2.15)
SW4_DIP_1P27_4P4X5P7
  rect 1.6x0.762 smd: 1(-2.54,0.635) 2(2.54,0.635) 3(-2.54,-0.635) 4(2.54,-0.635)
SW_2P8X5P7_SM
  rect 1.016x1.6 smd: 1(0,2.54) 2(0,-2.54)
TESTPOINT_35MIL
  round 0.889 smd: 1(0,0)
unnamed#2
  round 1.524 smd: (0,0)
X2SON8_0P35_1X1P35MM
  rect 0.66x0.17 smd: 1(-0.4,0.525)
  rect 0.61x0.17 smd: 2(-0.425,0.175) 3(-0.425,-0.175) 4(-0.425,-0.525) 5(0.425,-0.525) 6(0.425,-0.175) 7(0.425,0.175) 8(0.425,0.525)
XTL4_2P1X1P7MM_SM
  rect 0.762x0.711 smd: 1(-0.675,-0.5) 2(0.675,-0.5) 3(0.675,0.5) 4(-0.675,0.5)

## Nets
GND: BH1.1 BH2.1 BH3.1 C1.2 C2.2 C3.2 C4.2 C5.2 C6.2 C7.2 C8.2 C9.2 C10.2 C11.2 C12.2 C13.2 C14.2 C15.2 C16.2 C17.2 C18.2 C20.2 C21.2 C22.2 C23.2 C24.2 C25.2 C26.2 C27.2 C28.2 C29.2 C30.2 C31.2 C32.2 C33.2 C34.2 C35.2 C36.2 C37.2 C38.2 C39.2 C40.2 C41.2 C42.2 C43.2 C44.2 C45.2 C46.2 C47.2 C48.2 C49.2 C50.2 C51.2 C52.2 C53.2 C54.2 C55.2 C56.2 C57.2 C58.2 C59.2 C60.2 C61.2 C62.2 C63.2 C64.2 C65.2 C66.2 C67.2 C68.2 C69.2 C70.2 C71.2 C72.2 C73.2 C74.2 C75.2 C76.2 C77.2 C78.2 C79.2 C80.2 C82.2 C83.2 C84.2 C85.2 C86.2 C87.2 C88.2 C89.2 C90.2 C91.2 C92.2 C93.2 C94.2 C95.2 C96.2 C97.2 C98.2 C99.2 C100.2 C101.2 C102.2 C103.2 C104.2 C106.2 C108.2 C109.2 C111.2 C113.2 C114.2 C115.2 C116.2 C117.2 C118.2 C119.2 C120.2 C121.2 C122.2 C123.2 C124.2 C125.2 C126.2 C127.2 C128.2 C129.2 C130.2 C131.2 C132.2 C134.2 C139.2 C140.2 C142.2 C143.2 C145.2 C147.2 C148.2 C151.2 C152.2 C153.2 C154.2 C155.2 C156.2 C157.2 C158.2 C171.2 C172.2 C173.2 C174.2 C175.2 C176.2 C177.2 D1.C(CATHODE) D2.C(CATHODE) D3.C(CATHODE) D4.C(CATHODE) D5.C(CATHODE) D6.C(CATHODE) D7.C(CATHODE) D8.C(CATHODE) D9.C(CATHODE) D10.C(CATHODE) D12.3(COM_CATHODE) D13.3(COM_CATHODE) D14.3(COM_CATHODE) D15.3(COM_CATHODE) D16.3(COM_CATHODE) D17.3(COM_CATHODE) D18.3(COM_CATHODE) D19.3(COM_CATHODE) J2.3 J2.5 J5.S1 J5.S2 J6.S1 J6.S2 J7.S1 J7.S2 J8.S1 J8.S2 J9.S1 J9.S2 J10.S1 J10.S2 P17.1 P17.2 P17.7 P17.8 P17.10 P17.16 P17.18 P17.19 P17.24 P17.25 P17.27 P17.28 P17.29 P17.30 P17.39 P17.40 P17.41 P17.42 P17.43 P17.44 P17.49 P17.50 P17.SH1 P17.SH2 P17.SH3 P17.SH4 Q1.2(SOURCE) R1.2 R6.2 R9.2 R10.2 R19.2 R21.1 R22.1 R23.1 R24.2 R25.1 R26.2 R27.2 R28.1 R30.2 R33.2 R36.2 R41.2 R45.2 R55.2 R56.2 R57.2 R58.2 R62.2 R63.2 R71.2 R73.2 R75.2 R78.2 R89.2 R90.2 R94.2 R96.2 R108.2 R121.2 R122.2 R123.2 R124.2 R125.2 R126.2 U1.1 U2.1 U3.4 U4.37 U5.4 U6.A1 U6.A3 U6.A4 U6.A5 U6.A9 U6.A10 U6.A11 U6.A15 U6.A16 U6.B3 U6.B4 U6.B5 U6.B9 U6.B10 U6.B11 U6.C4 U6.C6 U6.C11 U6.C13 U6.D2 U6.D3 U6.D6 U6.D10 U6.D14 U6.D16 U6.E1 U6.E14(VSSIO_REFCLK3) U6.E16 U6.F3 U6.F7 U6.F10 U6.F14 U6.F15 U6.F16 U6.G3 U6.G6 U6.G7 U6.G8 U6.G9 U6.G10 U6.G14 U6.H7 U6.H8 U6.H9 U6.H10 U6.H14 U6.J1 U6.J2 U6.J3 U6.J7 U6.J8 U6.J9 U6.J10 U6.J14 U6.J16 U6.K7 U6.K8 U6.K9 U6.K10 U6.K14 U6.K15 U6.K16 U6.L7 U6.L8 U6.L9 U6.L10 U6.L14 U6.M1 U6.M2 U6.M3 U6.M14 U6.M15 U6.M16 U6.P9 U6.R1 U6.R2 U6.R3 U6.R5 U6.R7 U6.R9 U6.R11 U6.R13 U6.R15 U6.R16 U6.T1 U6.T2 U6.T15 U6.T16 U7.37 X1.2 X1.4
VDD_PF_1V1: C7.1 C29.1 C85.1 C129.1 C130.1 C131.1 C139.1 C142.1 C147.1 L5.1 L10.1 L13.1 L19.1 L20.1 L21.1 L22.1 LBK3.2 U5.24
VDD_PF_1V8: C1.1 C8.1 C39.1 C84.1 C91.1 C99.1 L1.1 L6.1 L11.2 L15.2 LBK1.2 R7.1 R12.1 U5.10
VDD_PF_3V3: C3.1 C4.1 C6.1 C10.1 C13.1 C14.1 C30.1 C87.1 C92.1 C93.1 C100.1 C115.1 C126.1 C155.1 L2.1 L3.1 L4.1 L7.1 L8.1 L9.1 L12.1 L14.1 L16.2 L18.2 LBK2.2 R11.1 R13.1 R20.1 R46.1 R98.1 S2.1 S2.3 U4.9 U5.26 U7.9
VDD_SYS_1V8: P17.26 R66.1 R69.1 U1.2 U2.2
VDD_SYS_3V3: C50.1 C53.1 C54.1 P17.31 P17.32 P17.33 P17.34 P17.35 P17.36 P17.37 P17.38 R4.1 R17.1 R79.1
VDD_SYS_5V0: C31.1 C32.1 C45.1 C106.1 C108.1 C114.1 C122.1 P17.45 P17.46 P17.47 P17.48 R8.1 U5.2 U5.6 U5.12 U5.20
VDDA_TRX_F_1: C61.1 C83.1 C154.1 L15.1 U7.8 U7.13 U7.16
VDDA_TRX_F_2: C16.1 C28.1 C116.1 L11.1 U4.8 U4.13 U4.16
VDDIO_PHY_1: C125.1 C127.1 C128.1 C145.1 L18.1 R29.1 U7.22 U7.27 U7.35
VDDIO_PHY_2: C94.1 C96.1 C97.1 C109.1 L16.1 R72.2 U4.22 U4.27 U4.35
VDDOTP: R26.1 TP7.1(TP) U5.23
CLK_TJA1: C81.2 R91.1
CLK_TJA2: C19.2 R92.1
ENET_MDC: P17.23 R69.2 U1.3 U2.3
ENET_MDIO: P17.21 R66.2 U1.4 U2.4
ETH_RST: P17.20 R2.1 R31.1 R99.1
ETH_RX1_N: C136.1 U7.30
ETH_RX1_P: C137.1 U7.31
ETH_RX2_N: C146.1 U4.30
ETH_RX2_P: C144.1 U4.31
ETH_RX4_N: C133.1 P17.6
ETH_RX4_P: C135.1 P17.4
ETH_TX1_N: C141.2 U6.P15
ETH_TX1_P: C138.2 U6.P16
ETH_TX2_N: C107.2 U6.N2
ETH_TX2_P: C105.2 U6.N1
ETH_TX4_N: P17.14 U6.K2
ETH_TX4_P: P17.12 U6.K1
ETH_WAKE_INT: P17.22 R14.2 R35.1 R49.2
GPIO8_TJA1: U6.J5 U7.26
GPIO8_TJA2: U4.26 U6.L4
GPIO9_TJA1: U6.K5 U7.28
GPIO9_TJA2: U4.28 U6.M4
I3C2A_SCL: P17.5 R18.2
I3C2A_SDA: P17.3 R15.2
INT_TJA1: R98.2 U6.E9 U7.2(\I\N\T\)
INT_TJA2: R20.2 U4.2(\I\N\T\) U6.J4
JTAG_RST_ETH: J2.10(B5) R2.2 U6.L13
JTAG_TCK_ETH: J2.4 U6.J12
JTAG_TDI_ETH: J2.8 U6.K12
JTAG_TDO_ETH: J2.6 U6.L12
JTAG_TMS_ETH: J2.2 U6.K13
PHY_MDC_TJA: R86.1 R88.2 U1.6 U4.1 U7.1
PHY_MDIO_TJA: R84.2 R85.1 U1.5 U4.36 U7.36
QSPI_IO0: U3.5 U6.E12
QSPI_IO1: U3.2 U6.E13
QSPI_IO2: U3.3(W\P\_IO2) U6.D13
QSPI_IO3: R3.2 U3.7 U6.F13
QSPI_SCLK: U3.6 U6.F12
QSPI_SS_N: R76.2 U3.1 U6.D12
RESET_TJA1: R46.2 U6.E10 U7.10
RESET_TJA2: R13.2 U4.10 U6.K4
SHIELD: C98.1 C171.1 J3.SH1 J3.SH2 J3.SH3 J3.SH4 J4.SH1 J4.SH2 J4.SH3 J4.SH4 R73.1 R108.1
SMI_AP_MDC: R68.2 U2.6 U6.N6
SMI_AP_MDIO: R65.2 U2.5 U6.P6
SPI4_PCS1: P17.15 R42.1
SPI4_PCS2: P17.17 R38.1
SPI4_SCK: P17.13 R44.1
SPI4_SIN: P17.11 R48.1
SPI4_SOUT: P17.9 R51.1
SW2_BOOT_OPTION0: R58.1 S2.4 U6.N7
SW2_BOOT_OPTION1: R57.1 S2.2 U6.P7
SW_100BT1_TRX5_M: L24.1 U6.T4
SW_100BT1_TRX5_P: L24.2 U6.T3
SW_100BT1_TRX6_M: L29.1 U6.T6
SW_100BT1_TRX6_P: L29.2 U6.T5
SW_100BT1_TRX7_M: L25.1 U6.T8
SW_100BT1_TRX7_P: L25.2 U6.T7
SW_100BT1_TRX8_M: L26.1 U6.T10
SW_100BT1_TRX8_P: L26.2 U6.T9
SW_100BT1_TRX9_M: L27.1 U6.T12
SW_100BT1_TRX9_P: L27.2 U6.T11
SW_100BT1_TRX10_M: L28.1 U6.T14
SW_100BT1_TRX10_P: L28.2 U6.T13
SW_P5_LED: R103.1 U6.E7
SW_P6_LED: R102.1 U6.C8
SW_P7_LED: R104.1 U6.D8
SW_P8_LED: R105.1 U6.E8
SW_P9_LED: R106.1 U6.C9
SW_P10_LED: R107.1 U6.D9
SW_VDD11_CORE: C33.1 C34.1 C37.1 C42.1 C59.1 C60.1 C62.1 C63.1 C68.1 C148.1 L22.2 U6.E6 U6.E11 U6.F6 U6.F11 U6.K6 U6.K11 U6.L6 U6.L11 U6.M11
SW_VDD33_AO: C5.1 C64.1 L4.2 U6.M8
SW_VDDA11: C27.1 C35.1 C58.1 C140.1 L20.2 U6.C2 U6.E2 U6.M9
SW_VDDA11_SGMII: C66.1 C70.1 C71.1 C143.1 L21.2 U6.L3 U6.N3 U6.N14
SW_VDDA25: C51.1 C72.1 C75.1 C76.1 C77.1 C78.1 C79.1 C157.1 U6.H5 U6.P8 U6.R4 U6.R6 U6.R8 U6.R10 U6.R12 U6.R14
SW_VDDA33_SGMII: C9.1 C57.1 C73.1 C74.1 L7.2 U6.K3 U6.P3 U6.P14
SW_VDDA33_VREG_IN: C2.1 C48.1 L2.2 U6.H6
SW_VDDIO: C12.1 C20.1 C26.1 C38.1 C40.1 C41.1 C43.1 C44.1 C47.1 C49.1 C56.1 C69.1 C103.1 C104.1 L8.2 R3.1 R5.1 R16.1 R53.1 R76.1 R80.1 R83.1 U3.8 U6.B16 U6.C3 U6.F1 U6.F8 U6.F9 U6.G1 U6.G11 U6.H1 U6.H11 U6.J6 U6.M6
SW_VDDIO_DBG: C55.1 C95.1 L3.2 R81.1 U6.J11
SW_VDDIO_HOST: C15.1 C36.1 C65.1 L9.2 R34.1 R37.1 R40.1 R43.1 R47.1 R50.1 R54.1 R59.1 R60.1 R61.1 R64.1 R65.1 R68.1 R70.1 R100.1 U6.E3 U6.M7
SW_VDDIO_MII2: C21.1 C24.1 C101.1 L6.2 U6.C5 U6.C7
SW_VDDIO_MII3: C22.1 C23.1 C90.1 L1.2 U6.C10 U6.C12
SW_VDDIO_SMI_OUT: C25.1 R5.2 R84.1 R88.1 S1.2 U6.C14
TJA1_TRX_CON_M: C149.2 D13.1 J4.2 R97.1
TJA1_TRX_CON_P: C150.2 D13.2 J4.1 R101.1
TJA1_TRX_M: L23.4 U7.15
TJA1_TRX_P: L23.1 U7.14
TJA1_WAKE_IO: R10.1 R39.1 U7.11
TJA2_TRX_CON_M: C110.2 D12.1 J3.2 R82.1
TJA2_TRX_CON_P: C112.2 D12.2 J3.1 R87.1
TJA2_TRX_M: L17.4 U4.15
TJA2_TRX_P: L17.1 U4.14
TJA2_WAKE_IO: R19.1 R52.1 U4.11
TRX_CON0_C_N: C160.2 L24.4
TRX_CON0_C_P: C159.2 L24.3
TRX_CON0_N: C160.1 D14.1 J5.2 R110.1
TRX_CON0_P: C159.1 D14.2 J5.1 R109.1
TRX_CON1_C_N: C162.2 L29.4
TRX_CON1_C_P: C161.2 L29.3
TRX_CON1_N: C162.1 D15.1 J6.2 R112.1
TRX_CON1_P: C161.1 D15.2 J6.1 R111.1
TRX_CON2_C_N: C164.2 L25.4
TRX_CON2_C_P: C163.2 L25.3
TRX_CON2_N: C164.1 D16.1 J7.2 R114.1
TRX_CON2_P: C163.1 D16.2 J7.1 R113.1
TRX_CON3_C_N: C166.2 L26.4
TRX_CON3_C_P: C165.2 L26.3
TRX_CON3_N: C166.1 D17.1 J8.2 R116.1
TRX_CON3_P: C165.1 D17.2 J8.1 R115.1
TRX_CON4_C_N: C168.2 L27.4
TRX_CON4_C_P: C167.2 L27.3
TRX_CON4_N: C168.1 D18.1 J9.2 R118.1
TRX_CON4_P: C167.1 D18.2 J9.1 R117.1
TRX_CON5_C_N: C170.2 L28.4
TRX_CON5_C_P: C169.2 L28.3
TRX_CON5_N: C170.1 D19.1 J10.2 R120.1
TRX_CON5_P: C169.1 D19.2 J10.1 R119.1
N20063595: R45.1 R49.1 U6.N5
N20063756: R30.1 U6.J15
N20063982: R99.2 R100.2 U6.P4
N20064039: R31.2 R34.2 U6.G4
N20064047: C111.1 U6.C1 X1.1
N20064083: R91.2 U6.G2
N20064132: R92.2 U6.H2
N20064194: C124.1 U6.D1 X1.3
N20064311: C135.2 U6.L1
N20064322: C133.2 U6.L2
N20064388: R61.2 U6.N10
N20064473: R36.1 U6.M10
N20064477: R54.2 R56.1 U6.N9
N20067427: C46.1 R32.2 U6.H4
N20068000: C52.1 R32.1 U6.H3
N20070589: C172.1 R109.2 R110.2 R121.1
N20070626: D10.A R103.2
N20070845: C173.1 R111.2 R112.2 R122.1
N20070884: D9.A R102.2
N20071078: C174.1 R113.2 R114.2 R123.1
N20071117: D8.A R104.2
N20071311: C175.1 R115.2 R116.2 R124.1
N20071350: D7.A R105.2
N20071559: C176.1 R117.2 R118.2 R125.1
N20071598: D6.A R106.2
N20071777: C177.1 R119.2 R120.2 R126.1
N20071816: D5.A R107.2
N20073301: C153.1 C156.1 L14.2 U7.7
N20073443: C67.1 C132.1 C134.1 L19.2 U7.29 U7.34
N20073606: C82.1 C86.1 C151.1 C152.1 L13.2 U7.3 U7.4
N20073885: C80.1 C81.1 U7.6
N20073941: R94.1 R95.1 U7.17
N20073964: R93.1 U7.18
N20074016: R90.1 U7.20
N20074020: C141.1 U7.33
N20074039: C138.1 U7.32
N20074083: R33.1 U7.24
N20074085: R89.1 U7.25
N20074093: D4.A R95.2
N20074095: D3.A R93.2
N20074346: C158.1 R96.1 R97.2 R101.2
N20076043: C113.1 C121.1 L12.2 U4.7
N20076182: C11.1 C17.1 C102.1 L5.2 U4.29 U4.34
N20076345: C117.1 C118.1 C119.1 C120.1 L10.2 U4.3 U4.4
N20076624: C18.1 C19.1 U4.6
N20076680: R75.1 R77.1 U4.17
N20076703: R74.1 U4.18
N20076816: R71.1 U4.24
N20076820: R1.1 U4.25
N20076828: D2.A R77.2
N20076830: D1.A R74.2
N20084269: LBK1.1 U5.5
N20086135: R17.2 TP6.1(TP) U5.9(XFAILB)
N20086262: D11.A R4.2
N20086369: Q1.1 R79.2 TP1.1(TP) U5.8
N20086448: R11.2 TP3.1(TP) U5.7
N20087000: LBK2.1 U5.3
N20089763: R7.2 R18.1 U5.27
N20089768: R12.2 R15.1 U5.28
N20090580: LBK3.1 U5.19
N20091958: R28.2 U5.21
N20091963: R21.2 U5.15
N20178006: R83.2 U6.B2
N20183080: R40.2 U6.N12
N20183085: R59.2 U6.P12
N20183704: R55.1 U6.N8
N20183709: R62.1 U6.P10
N20183972: TP5.1(TP) U6.B15
N20184853: R64.2 U6.N11
N20184913: R60.2 U6.P11
N20184918: R47.2 U6.N13
N20184923: R50.2 U6.P13
N20184928: R43.2 U6.M13
N20184938: R37.2 U6.M12
N20203414: R29.2 U7.23
N20214787: R72.1 U4.23
N20222602: R35.2 R39.2 R41.1 R52.2 R53.2 U6.N4
N20229760: C146.2 U6.P2
N20229763: C144.2 U6.P1
N20229809: C137.2 U6.N16
N20231645: C107.1 U4.33
N20231659: C105.1 U4.32
N20245926: C136.2 U6.N15
N20249432: J2.1 R81.2
N20256327: C112.1 L17.2
N20256378: C110.1 L17.3
N20256418: C123.1 R78.1 R82.2 R87.2
N20262685: R80.2 U6.A2
N20265717: R25.2 U5.17
N20265722: R22.2 U5.14
N20267788: TP4.1(TP) U6.B1
N20267824: R14.1 R16.2 U6.D5
N20268786: R24.1 U5.16
N20268791: R23.2 U5.13
N20349681: C89.1 R70.2 U2.7(VREF2) U2.8
N20527855: C150.1 L23.2
N20527862: C149.1 L23.3
N20616572: C88.1 R67.2 U1.7(VREF2) U1.8
N20619103: R63.1 R67.1 S1.1(NC)
N20627195: R8.2 U5.1
N20627425: R27.1 U5.22
N20845556: J2.7 R9.1
N20845723: J2.9 R6.1
N20850917: TP2.1(TP) U6.G5
N20850923: TP8.1(TP) U6.F2
N20864992: R86.2 U6.C15
N20864995: R85.2 U6.C16
N20865085: R51.2 U6.E5
N20865086: R48.2 U6.D4
N20865087: R42.2 U6.F4
N20865088: R38.2 U6.F5
N20865089: R44.2 U6.E4
N21113439: D11.C(CATHODE) Q1.3

Pads without a net: U4 5 12 19 20 21; U6 A6 A7 A8 A12 A13 A14 B6 B7 B8 B12 B13 B14 D7 D11 D15 E15 G12 G13 G15 G16 H12 H13 H15 H16 J13 L5 L15 L16 M5 P5; U7 5 12 19 21

## Via types
v1: diameter 0.457, hole 0.203, TOP to BOTTOM, 763 vias

## Routing (per net, layer and track width the routed paths; a pad name or vN(x,y) marks a point on that pad's centre or on a via; arc(x,y) is an arc through that point)
GND: length 233.9
  TOP w0.2: U1.1 63.68,12.78 63.86,12.6 v1(63.86,12.25)
  TOP w0.203: P17.29 64.14,25 v1(63.87,24.73) 63.87,24.59 64.26,24.2 P17.25 ; 65.37,27.4 64.97,27 P17.39 ; 65.37,27.4 P17.41 ; 65.37,27.4 v1(65.39,27.43) 65.02,27.8 P17.43 ; P17.SH1 62.42,18.93 v1(62.68,19.19) 62.47,19.4 P17.2 ; P17.27 65.37,24.6 v1(65.38,24.61) ; P17.40 62.94,27 v1(63.21,27.26) 62.67,27.8 P17.44 ; P17.18 62.46,22.6 v1(62.63,22.43) 62.41,22.2 P17.16 ; P17.10 62.46,21 v1(62.62,20.84) 62.38,20.6 P17.8 ; P17.1 64.13,19.4 63.92,19.2 v1(63.92,18.93) P17.SH2 ; P17.42 61.39,27.4 v1(61.13,27.14) ; 61.23,24.39 61.23,24.85 61.38,25 P17.30 ; v1(63.78,22.75) 64.03,23 P17.19
  TOP w0.254: v1(61.14,24.3) 61.44,24.6 P17.28 ; v1(61.13,27.14) 60.93,26.94 C45.2 ; U2.1 49.97,10.18 C89.2 ; C58.2 43.91,25.2 v1(43.46,25.2) ; v1(62.64,23.48) 62.32,23.8 P17.24 ; v1(43.46,21.2) 43.46,21.26 44.1,21.91 C72.2 ; P17.50 P17.SH4 ; v1(63.78,20.83) 64.01,20.6 P17.7
  TOP w0.3: v1(62.16,15.95) 61.91,15.71 R63.2 ; C88.2 63.36,11.76 v1(63.86,12.25)
  TOP w0.305: D8.C 45.7,1.83 ; D8.C 45.06,2.5 ; D8.C 44.41,1.83 ; D8.C 45.06,1.15 ; D6.C 30.06,2.5 ; D6.C 30.06,1.15 ; D6.C 29.41,1.83 ; D6.C 30.7,1.83 ; C52.2 50.98,25.96 51.28,25.66 v1(51.28,25.32) ; v1(22.56,1.83) 23.2,1.83 ; v1(22.56,1.83) 22.56,1.15 ; v1(22.56,1.83) 21.91,1.83 ; v1(22.56,1.83) 22.56,2.5 ; D7.C 38.2,1.83 ; D7.C 36.91,1.83 ; D7.C 37.56,1.15 ; D7.C 37.56,2.5 ; 59.41,1.83 D10.C ; D10.C 60.06,1.15 ; D10.C 60.7,1.83 ; D10.C 60.06,2.5 ; D9.C 52.56,2.5 ; D9.C 52.56,1.15 ; D9.C 53.2,1.83 ; D9.C 51.91,1.83
  TOP w0.381: 51.46,22.25 v1(51.46,22.29) ; 51.46,22.25 51.81,21.9 R45.2 ; 51.46,22.25 51.01,21.8 C71.2 ; C48.2 45.91,26.38 46.21,26.08 C51.2 ; R1.2 v1(30.47,42.27) ; v1(42.66,30) 41.91,30 C33.2 ; v1(51.28,25.32) 51.57,25.32 52.21,25.97 C49.2 ; C53.2 59.59,25.98 59.92,26.31 C45.2 59.71,27.15 v1(59.71,28.45) ; R26.2 R27.2 55.97,28.74 R28.1 ; C21.2 46.6,30.86 v1(46.66,30.8) ; C50.2 66.99,25.56 C54.2 67,24.8 v1(66.99,24.8) ; C73.2 38.67,21.16 v1(38.67,20.38) ; R58.2 v1(64.09,15.08) ; C44.2 C38.2 52.15,28.73 51.68,29.2 v1(50.66,29.2) ; v1(62.63,29.43) 62.58,29.48 P17.SH4 ; R57.2 v1(67.06,15.09)
  TOP w0.5: C86.2 31.31,16.18 v1(31.31,15.55) ; R10.2 22.04,34.57 v1(22.03,34.58) ; J2.5 38.78,34.73 R9.2 ; v1(49.85,40.55) 50.69,40.55 C5.2 C9.2 C12.2 ; v1(24.77,30.18) 25.38,30.18 C28.2 25.44,30.27 R19.2 ; C87.2 v1(26.97,16.39) ; D1.C v1(4.19,35) ; D3.C v1(4.19,22.77) ; C84.2 v1(24.48,17.2) ; C15.2 50.87,35.5 v1(49.81,35.5) ; v1(27.21,24.81) 27.02,24.63 C61.2 ; v1(50.47,9.06) 50.47,9.68 C89.2 ; R30.2 37.63,26.76 37.63,25.96 v1(37.27,25.6) ; C80.2 27.22,20.33 v1(27.22,21.19) ; v1(28.37,24.81) 28.61,25.06 R33.2 ; C11.2 v1(33.96,39.3) ; v1(48.28,41.65) 48.29,41.66 C2.2 ; R6.2 v1(34.84,33.5) ; C67.2 v1(30.81,22.32) ; R55.2 v1(45.39,15.52) ; D4.C v1(4.19,15.32) ; D2.C v1(4.19,27.93)
  L2_GND1 w0.5: J2.3 40.67,35.43 ; J2.3 40.67,36.67 ; J2.3 39.44,36.67 ; J2.3 39.44,35.43 ; J2.5 39.4,35.43 ; J2.5 38.17,35.43 ; J2.5 39.4,36.67 ; J2.5 38.17,36.67
  L5_GND2 w0.5: J2.5 39.4,35.43 ; J2.5 38.17,35.43 ; J2.5 39.4,36.67 ; J2.5 38.17,36.67 ; 39.44,36.67 J2.3 ; J2.3 40.67,36.67 ; J2.3 39.44,35.43 ; J2.3 40.67,35.43
  BOTTOM w0.203: C147.2 v1(60.04,20.88) ; v1(38.67,20.38) 38.67,20.42 U6.R15 ; U6.J1 50.32,25.66 50.94,25.66 v1(51.28,25.32) ; v1(38.69,19.57) 38.69,19.63 U6.T15 ; U6.A1 v1(50.76,32.51)
  BOTTOM w0.254: U6.H8 v1(45.06,26.8) ; U6.R16 v1(38.67,20.38) ; U6.E1 v1(50.66,29.2) ; U6.F3 v1(49.06,28.4) ; U6.D16 v1(37.86,29.2) U6.E16 ; U6.B11 v1(41.86,31.6) ; U6.F16 v1(37.86,28.4) ; U6.A10 v1(42.66,32.4) ; U6.D3 v1(49.06,30) ; U6.M2 49.84,23.59 v1(49.87,23.59) ; U6.A11 v1(41.86,32.4) ; U6.G10 v1(42.66,27.6) ; U6.E14 v1(39.46,29.2) ; U6.F14 v1(39.46,28.4) ; U6.R5 v1(47.46,20.4) ; U6.B9 v1(43.46,31.6) ; U6.M3 v1(49.06,22.8) ; U6.J9 v1(43.46,25.2) ; v1(63.32,32.1) 63.17,31.95 v1(60.28,31.95) v1(59.6,31.95) v1(58.92,31.95) 56.47,31.95 ; v1(39.06,32.58) U6.A15 ; U6.K9 v1(43.46,24.4) ; U6.L9 v1(43.46,23.6) ; U6.M1 v1(50.66,23.6) ; U6.K14 v1(39.46,24.4) ; U6.C4 v1(48.26,30.8) ; U6.F7 v1(45.86,28.4) ; U6.L7 v1(45.86,23.6) ; U6.A9 v1(43.46,32.4) ; U6.T1 v1(50.66,19.6) ; U6.L14 v1(39.46,23.6) ; U6.B4 v1(48.26,31.6) ; U6.R3 v1(49.06,20.4) ; U6.J16 v1(37.27,25.6) ; U6.G7 v1(45.86,27.6) ; U6.R1 v1(50.66,20.4) ; U6.M14 v1(39.46,22.8) ; U6.C6 v1(46.66,30.8) U6.B5 ; U6.G8 v1(45.06,27.6) ; U6.R9 v1(43.46,20.4) ; U6.B3 v1(49.06,31.6) ; U6.G9 v1(43.46,27.6) ; U6.R11 v1(41.86,20.4) ; U6.H9 v1(43.46,26.8) ; U6.D14 v1(39.46,30) ; U6.L10 v1(42.66,23.6) ; U6.H14 v1(39.47,26.01) ; U6.D2 v1(49.86,30) ; U6.M15 v1(38.66,23.6) U6.M16 ; U6.F15 v1(38.66,28.4) ; U6.G6 v1(46.66,27.6) ; U6.G14 v1(39.46,27.6) ; U6.K16 v1(38.66,25.21) ; U6.R2 v1(49.86,20.4) ; U6.K10 v1(42.66,24.4) ; U6.J10 v1(42.66,25.2) ; U6.H7 v1(45.86,26.8) ; U6.C13 v1(40.26,30.8) ; v1(48.26,32.4) U6.A4 U6.A5 ; U6.T2 v1(49.86,19.6) ; U6.C11 v1(41.86,30.8) ; U6.D10 v1(42.66,30) ; U6.G3 v1(49.06,27.6) ; U6.D6 v1(46.66,30) ; U6.F10 v1(42.66,28.4) ; U6.A3 v1(49.06,32.4) ; U6.P9 v1(43.46,21.2) ; U6.R7 v1(45.86,20.4) ; U6.J3 v1(49.06,25.2) ; U6.J14 v1(39.46,25.2) ; U6.T16 v1(38.69,19.57) ; U6.K15 v1(38.66,24.4) ; U6.J7 v1(45.86,25.2) ; U6.B10 v1(42.66,31.6) ; U6.R13 v1(40.26,20.4) ; U6.K8 v1(45.06,24.4) ; U6.J8 v1(45.06,25.2) ; U6.L8 v1(45.06,23.6) ; U6.A16 v1(37.86,32.4) ; U6.K7 v1(45.86,24.4) ; U6.H10 v1(42.66,26.8)
  BOTTOM w0.3: C145.2 v1(34.46,21.96) ; Q1.2 v1(65.05,38)
  BOTTOM w0.305: X1.2 53.35,29.33 53.35,28.36 C124.2 ; U6.J2 v1(49.06,25.2) ; 52.34,30.69 52.35,30.68
  BOTTOM w0.381: C125.2 28.51,28.05 28.56,28.03 28.61,28 28.73,27.88 v1(29.37,27.88) ; v1(30.47,42.27) 30.81,41.94 C94.2 ; 28.03,41.24 v1(27.99,41.27) ; v1(29.46,41.86) 29.73,41.59 R71.2
  BOTTOM w0.5: D12.3 v1(11.87,32.25) ; C158.2 v1(14.61,14) ; R78.2 14.58,36.34 v1(14.58,37.15) ; J10.S2 v1(16.35,3.51) ; C151.2 C152.2 ; v1(11.62,42.09) 11.62,41.4 R73.2 10.66,41.59 v1(10.66,42.09) ; v1(7.38,8.7) 7.38,9.22 C171.2 8.34,9.18 v1(8.34,8.69) ; C115.2 24.96,29.98 v1(24.77,30.18) ; C122.2 54.65,29.34 X1.2 ; v1(32.01,29.16) 32.2,29.36 32.96,29.36 C120.2 ; v1(51.14,31.09) 51.55,30.68 52.35,30.68 ; C129.2 v1(33.76,27.19) ; 21.26,1.55 v1(21.26,3.51) ; D13.3 v1(11.87,19) ; C111.2 52.34,30.69 ; v1(60.04,22.84) v1(60.04,22.24) C142.2 v1(60.04,20.88) 60.04,20.87 C147.2 ; v1(6.14,8.7) 6.14,9.28 R108.2 5.24,9.18 v1(5.24,8.72) ; v1(64.87,42.46) C90.2 C95.2 64.87,40.17 v1(65.28,39.75) 64.87,39.33 C101.2 ; R96.2 v1(14.61,24) ; J7.S2 v1(38.85,3.51) ; v1(8.71,42.05) 8.71,41.46 C98.2 9.56,41.43 v1(9.56,42.08) ; C102.2 34.21,37.64 33.96,37.9 v1(33.96,39.3) ; C123.2 v1(14.51,27.3) ; 36.26,1.55 v1(36.26,3.51) ; C103.2 50.44,36.29 50.44,35.54 50.4,35.5 C104.2 v1(49.81,35.5) ; C96.2 28.03,41.24 ; v1(47.43,41.88) 47.12,41.57 U3.4 ; 51.26,1.55 v1(51.26,3.51) ; J6.S2 v1(46.35,3.51) ; 28.76,1.55 v1(28.76,3.51) ; J5.S2 v1(53.85,3.51) ; v1(45.39,15.52) 46.36,15.52 C157.2 ; J9.S2 v1(23.85,3.51) ; 43.76,1.55 v1(43.76,3.51) ; v1(27.99,41.27) 27.89,41.38 C93.2 ; 58.76,1.55 v1(58.76,3.51) ; v1(21.01,36.85) R75.2 ; J8.S2 v1(31.35,3.51) ; C109.2 v1(34.84,33.5)
  vias: v1(0.78,10.86) v1(0.78,8.36) v1(0.78,5.86) v1(6.83,0.78) v1(7.05,43.22) v1(9.33,0.78) v1(9.55,43.22) v1(11.83,0.78) v1(12.05,43.22) v1(12.89,12.29) v1(13.21,25.11) v1(13.19,23.31) v1(13.36,39.85) v1(13.41,41.5) v1(14.33,0.78) v1(14.43,8.25) v1(14.43,5.62) v1(14.55,43.22) v1(15.99,27.82) v1(16.02,23.76) v1(16.01,12.26) v1(16.14,5.04) v1(16.89,22.86) v1(17.05,43.22) v1(17.01,28.54) v1(17.01,26.82) v1(16.97,24.96) v1(17.37,6.6) v1(17.79,20.7) v1(18.09,37.89) v1(18.07,36.15) v1(18.14,29.56) v1(18.09,23.91) v1(18.13,21.9) v1(18.16,27.75) v1(18.63,17.29) v1(18.81,7.8) v1(19.04,34.7) v1(19.04,20.95) v1(19.06,37.01) v1(19.14,25.24) v1(19.13,23.11) v1(19.23,30.24) v1(19.17,28.62) v1(19.17,26.9) v1(19.33,0.78) v1(19.55,43.22) v1(20.29,6.6) v1(20.41,41.54) v1(21.13,13.06) v1(21.22,23.15) v1(21.66,11.56) v1(21.63,5.26) v1(21.89,24.45) v1(22.05,43.22) v1(22.91,21.9) v1(23.01,13.85) v1(23.46,5.31) v1(24.51,23.6) v1(24.47,11.71) v1(24.87,6.6) v1(25.71,16.4) v1(26.35,16.98) v1(26.31,7.8) v1(26.45,28.38) v1(26.4,27.1) v1(26.83,0.78) v1(27.13,40.44) v1(27.16,29.97) v1(27.21,37.01) v1(27.21,35.81) v1(27.21,34.52) v1(27.22,33.39) v1(27.21,23.61) v1(27.21,22.32) v1(27.79,6.6) v1(28.37,37.01) v1(28.37,35.83) v1(28.37,34.54) v1(28.38,33.4) v1(28.37,23.62) v1(28.37,22.34) v1(28.38,21.2) v1(29.05,30.31) v1(29.08,30.99) v1(29.26,5.25) v1(29.63,37.01) v1(29.63,35.81) v1(29.64,34.55) v1(29.63,33.4) v1(29.63,24.81) v1(29.63,23.61) v1(29.64,22.35) v1(29.63,21.2) v1(29.96,29.69) v1(29.92,17.74) v1(30.06,28.26) v1(30.81,37.01) v1(30.81,35.81) v1(30.81,34.52) v1(30.82,33.39) v1(30.81,24.81) v1(30.81,23.61) v1(30.82,21.19) v1(30.98,29.7) v1(31.01,28.21) v1(30.97,5.25) v1(31.96,28.12) v1(32.37,6.6) v1(32.71,17) v1(32.71,15.65) v1(33.11,26.35) v1(33.1,13.44) v1(33.81,16.94) v1(33.81,7.8) v1(34.13,24.51) v1(34.33,0.78) v1(35.16,29.95) v1(35.29,6.6) v1(35.61,10.9) v1(35.79,24.97) v1(36.58,4.83) v1(37.26,10.9) v1(38.41,18.55) v1(38.54,4.8) v1(39.87,6.6) v1(41.31,7.8) v1(41.83,0.78) v1(41.91,16.05) v1(42.66,22.8) v1(42.63,14.57) v1(42.79,6.6) v1(42.91,10.75) v1(43.61,4.86) v1(46.79,4.91) v1(47.37,6.6) v1(47.46,23.6) v1(47.46,22.8) v1(47.86,9) v1(48.81,7.7) v1(49.33,0.78) v1(50.29,6.6) v1(50.89,4.89) v1(51.86,11.75) v1(52.26,14.75) v1(53.45,12.47) v1(53.56,11.25) v1(54.18,13.96) v1(54.17,4.92) v1(54.55,22.84) v1(54.55,21.6) v1(54.55,20.33) v1(54.77,31.96) v1(54.77,31.27) v1(54.87,6.6) v1(55.02,32.81) v1(55.11,29.64) v1(55.46,31.96) v1(56.31,7.8) v1(56.83,0.78) v1(57.47,38.54) v1(57.71,12.4) v1(57.79,6.6) v1(58.24,5.08) v1(58.46,10.8) v1(59.56,37.29) v1(59.56,10.8) v1(59.59,41.27) v1(59.58,40.45) v1(59.58,39.42) v1(59.58,38.31) v1(59.58,36.26) v1(59.61,15.74) v1(59.59,5.08) v1(61.83,0.78) v1(63.82,32.8) v1(63.84,31.74) v1(64.46,30.01) v1(65.19,34.14) v1(65.51,17.3) v1(65.94,33.95) v1(66.85,30.11) v1(67.41,32.99) v1(67.41,32.4) v1(67.39,31.79) v1(68.11,41.65) v1(68.23,38.27) v1(68.23,35.77) v1(68.23,33.27) v1(68.23,30.77) v1(68.23,18.27) v1(68.23,15.77) v1(68.23,13.27) v1(68.23,10.77) v1(68.23,8.27) v1(68.23,5.77)
